# Altium PCB main.PcbDoc (part 1 of 8)
Units mil, origin at the board's own origin, x right, y up, seen from the top; angles counter-clockwise.
Board outline 3385.83 x 2362.2 mil, 8 copper layers (L1 (SIG), L2 (GND), L3 (SIG), L4 (GND), L5 (PWR), L6 (SIG), L7 (GND), L8 (SIG)), stack 46.958 mil thick; 318 components, 288 nets, 1482 pads, 1056 vias.
Unrouted connection lines stored in the file: 7.
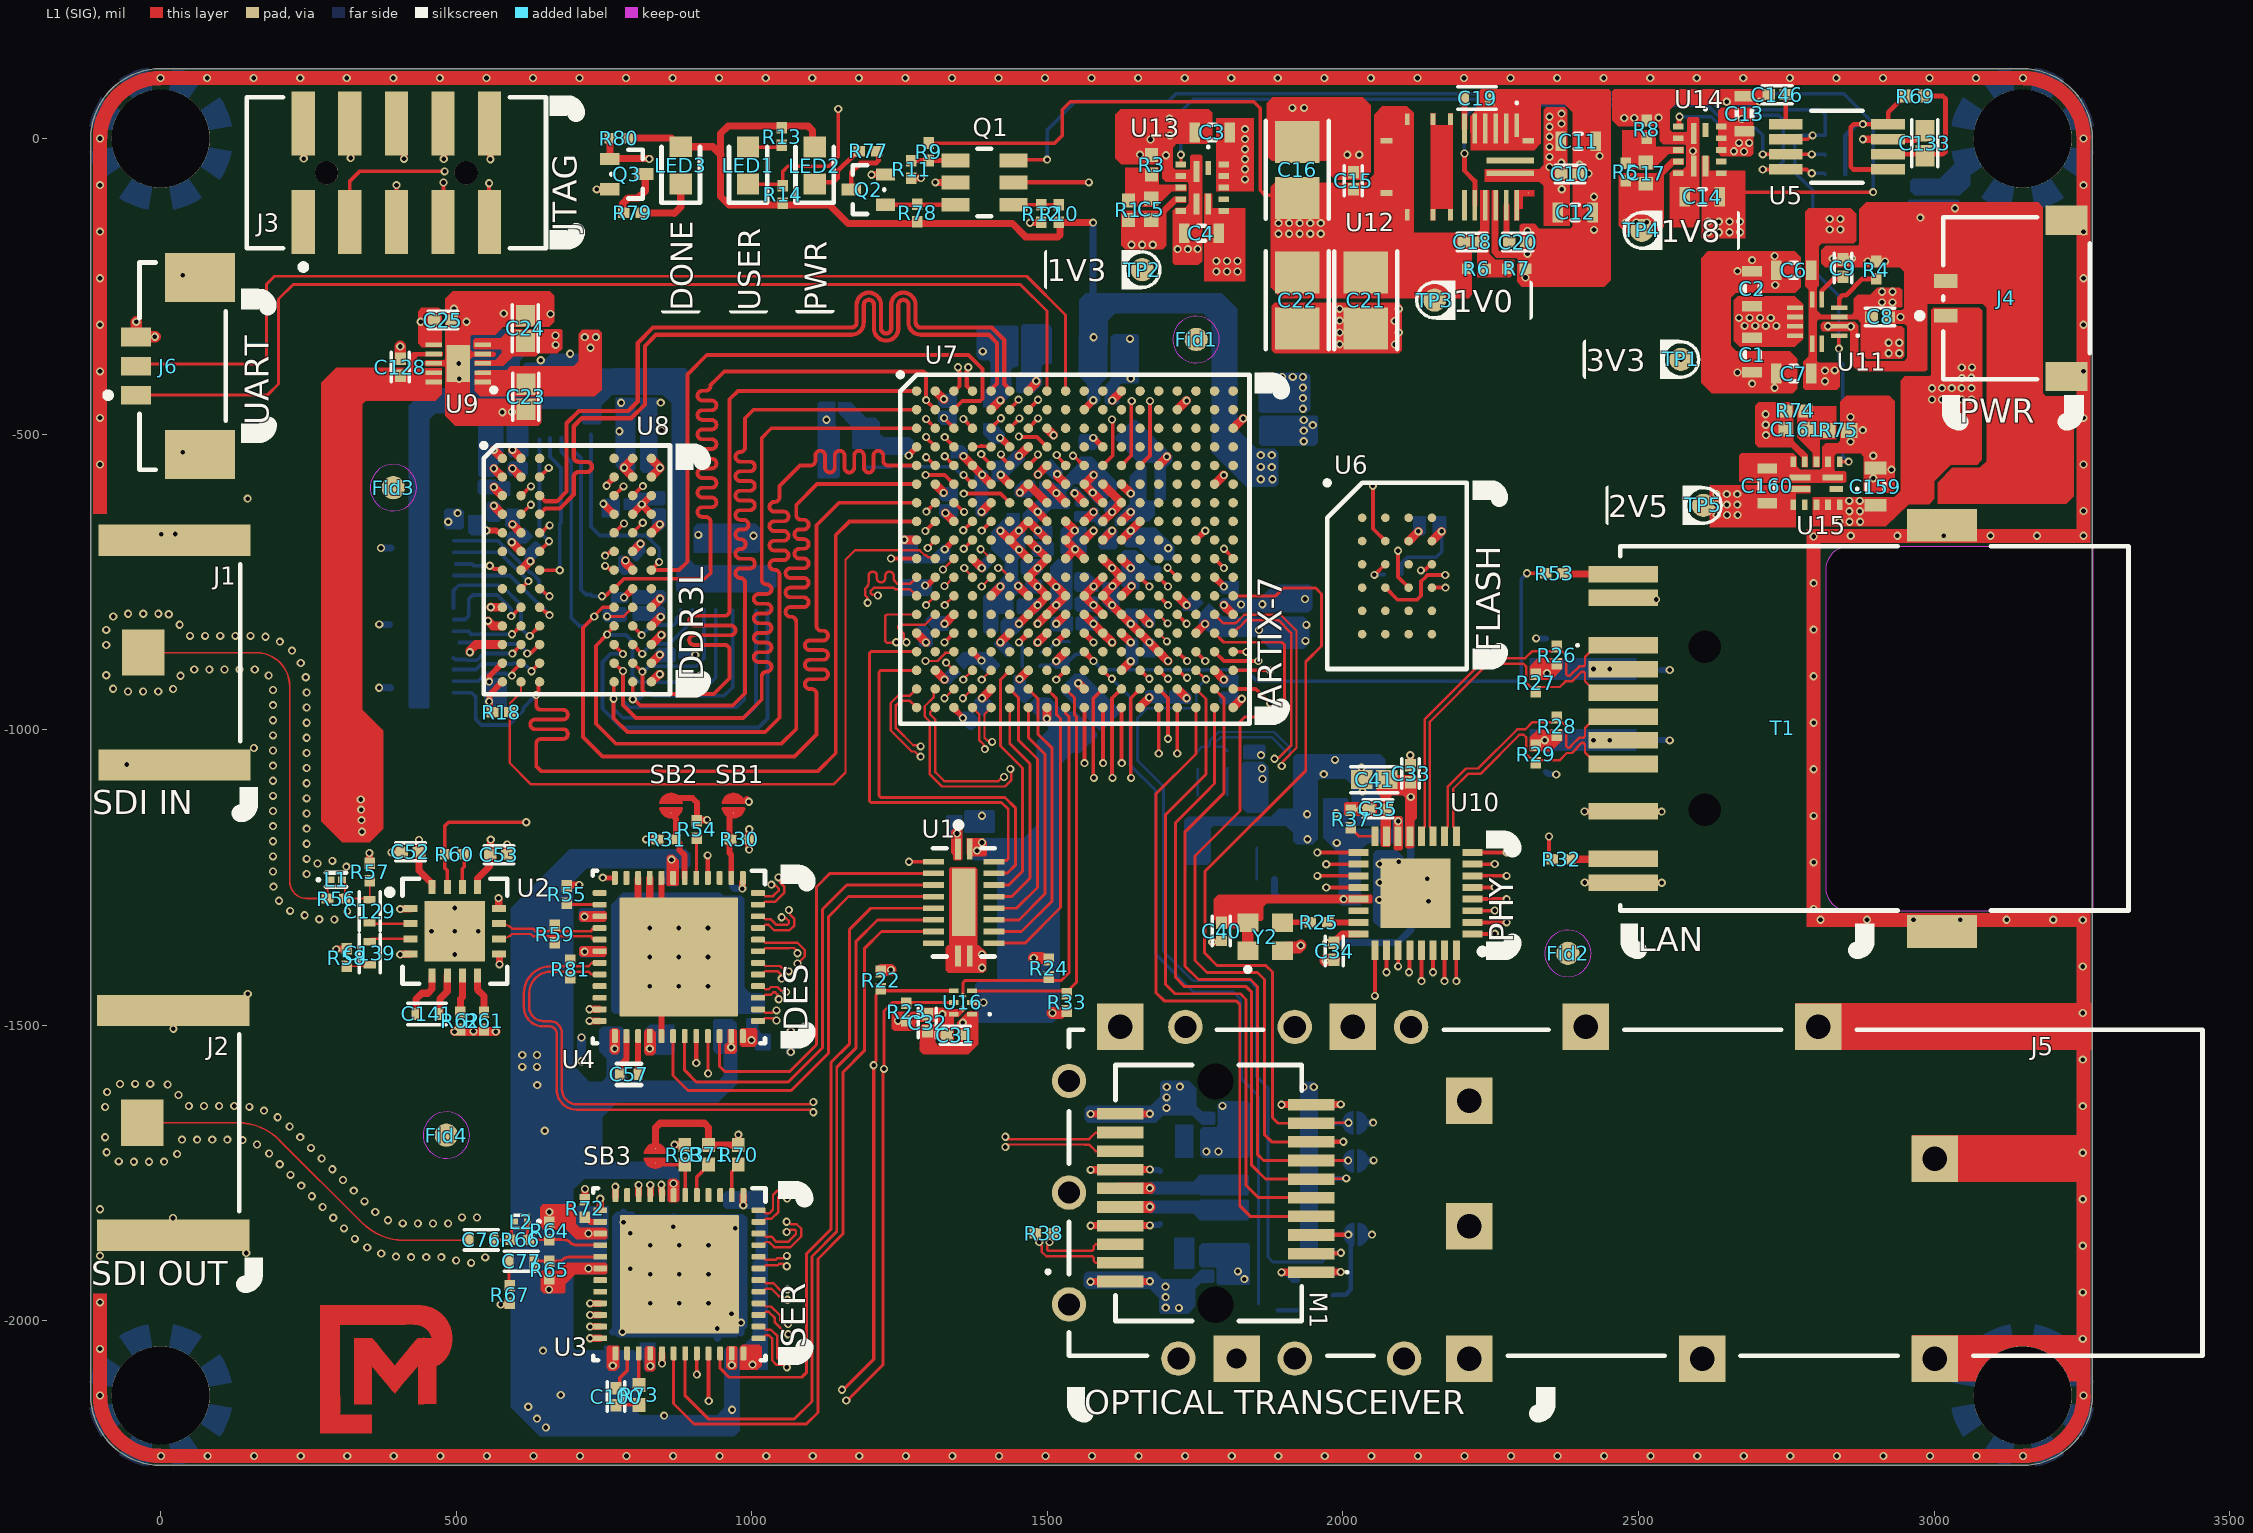
[diagram p0: L1 (SIG) view]
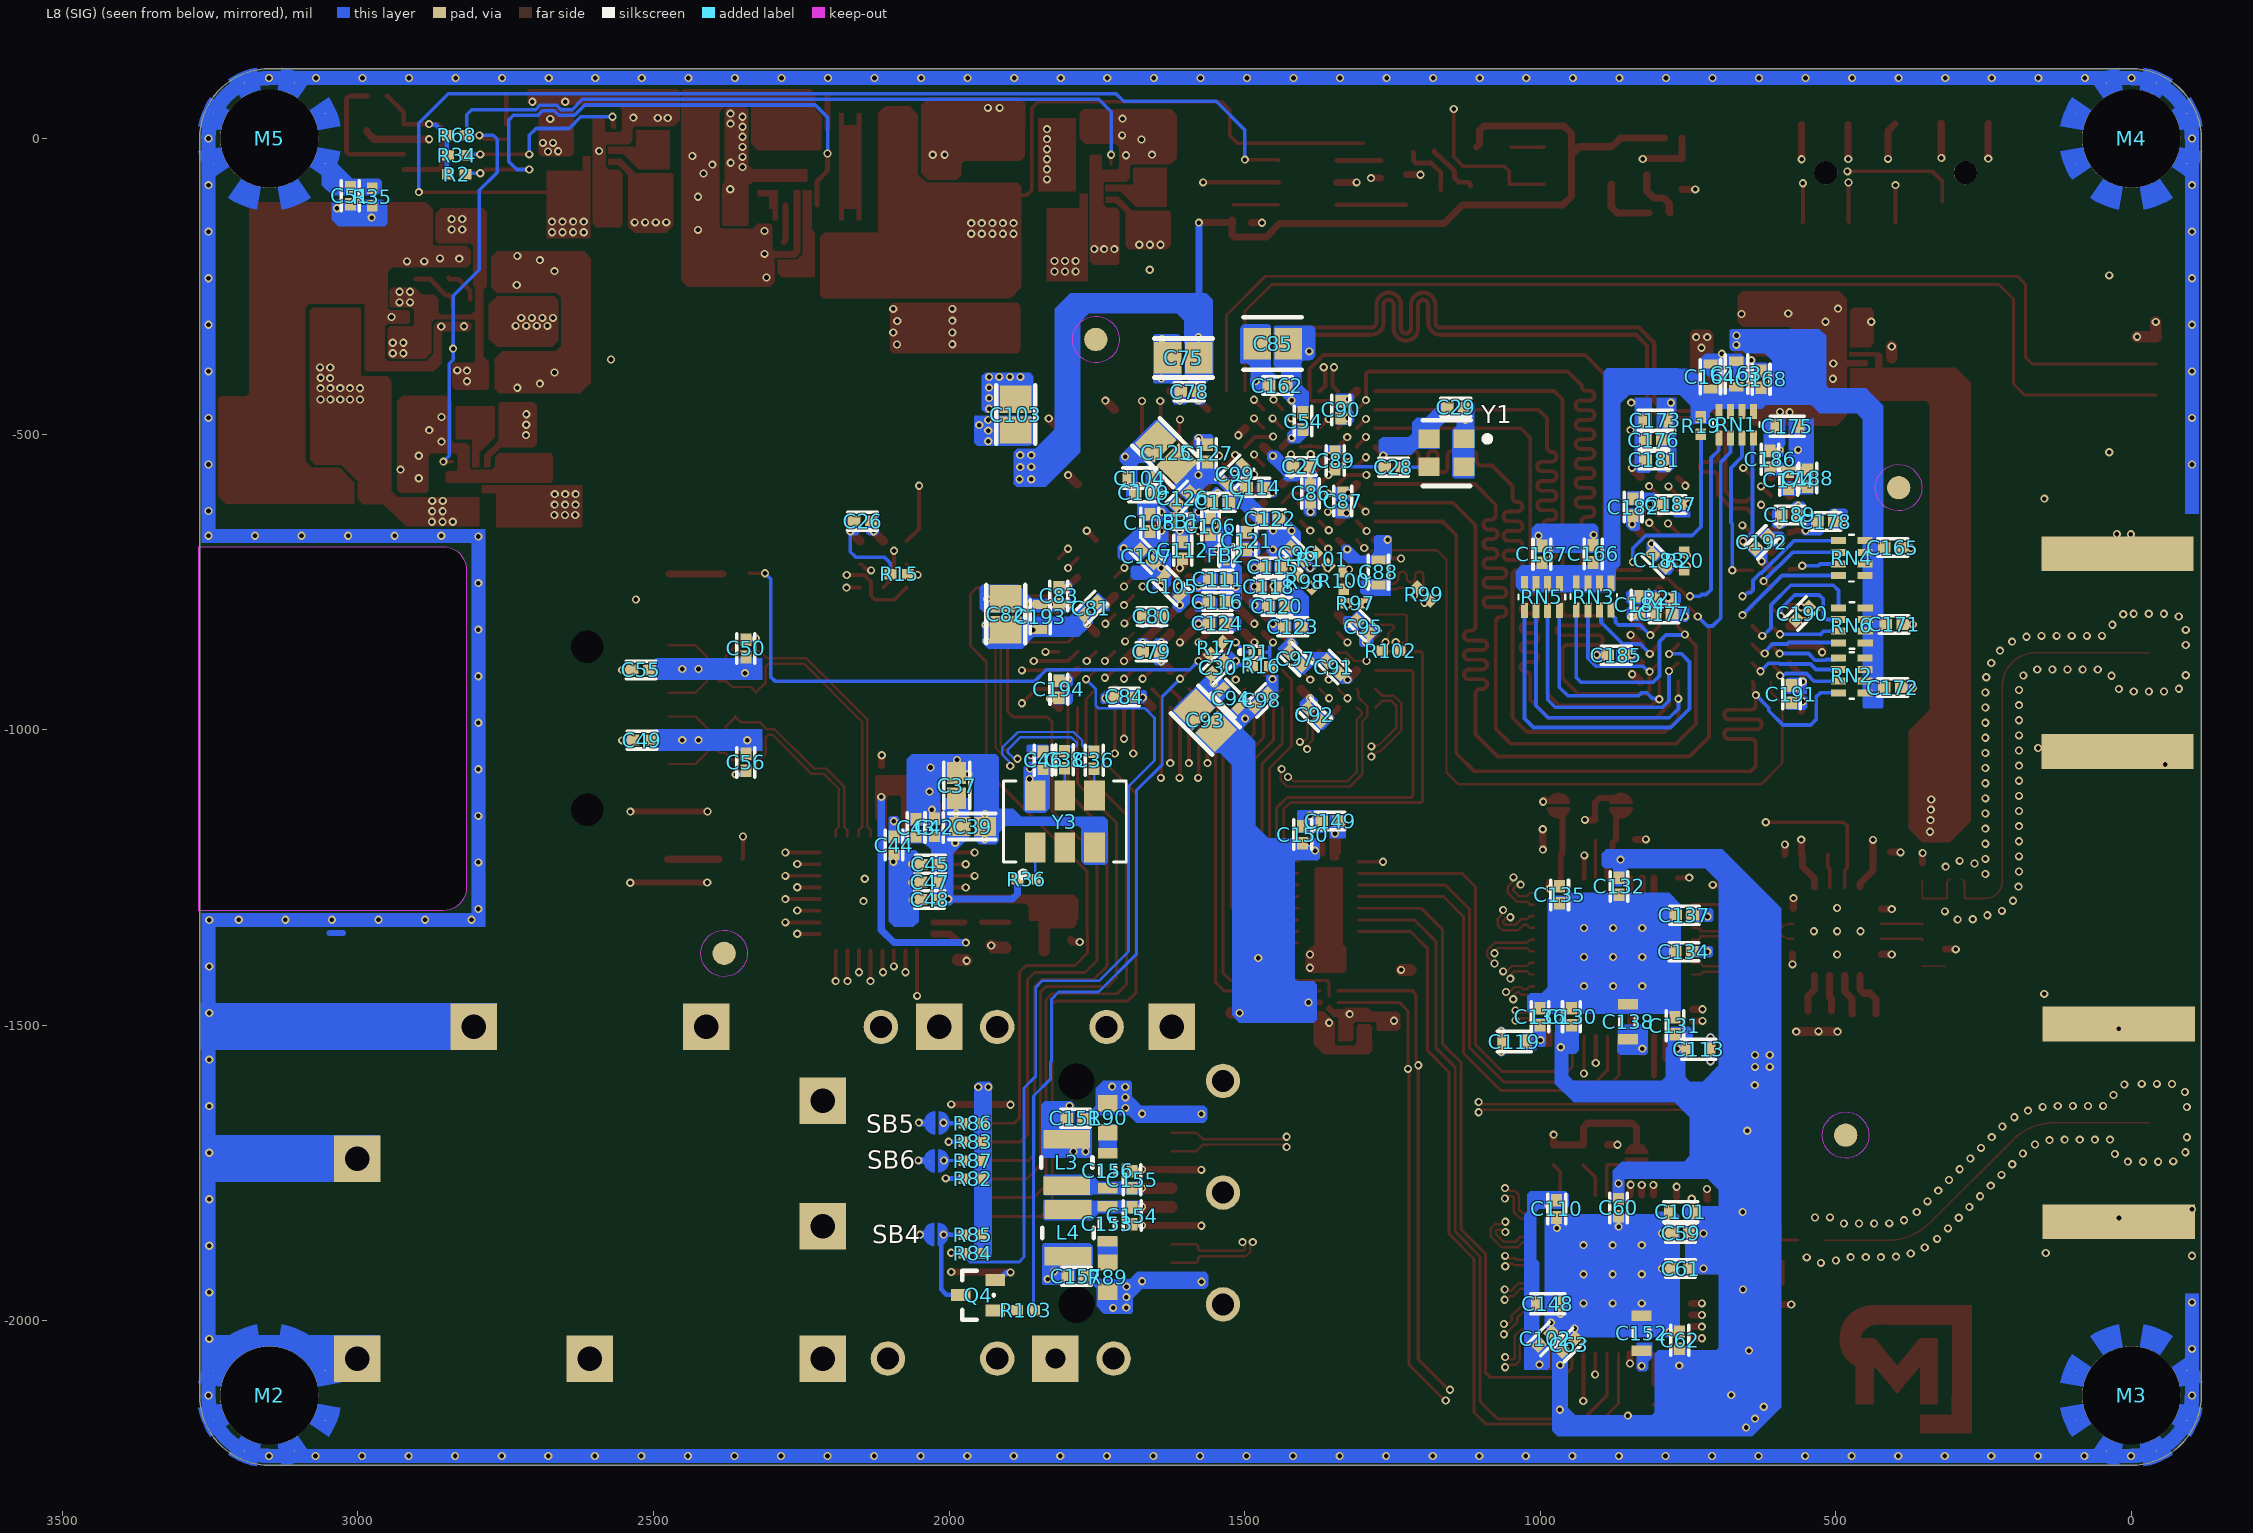
[diagram p1: L8 (SIG) view, seen from below]
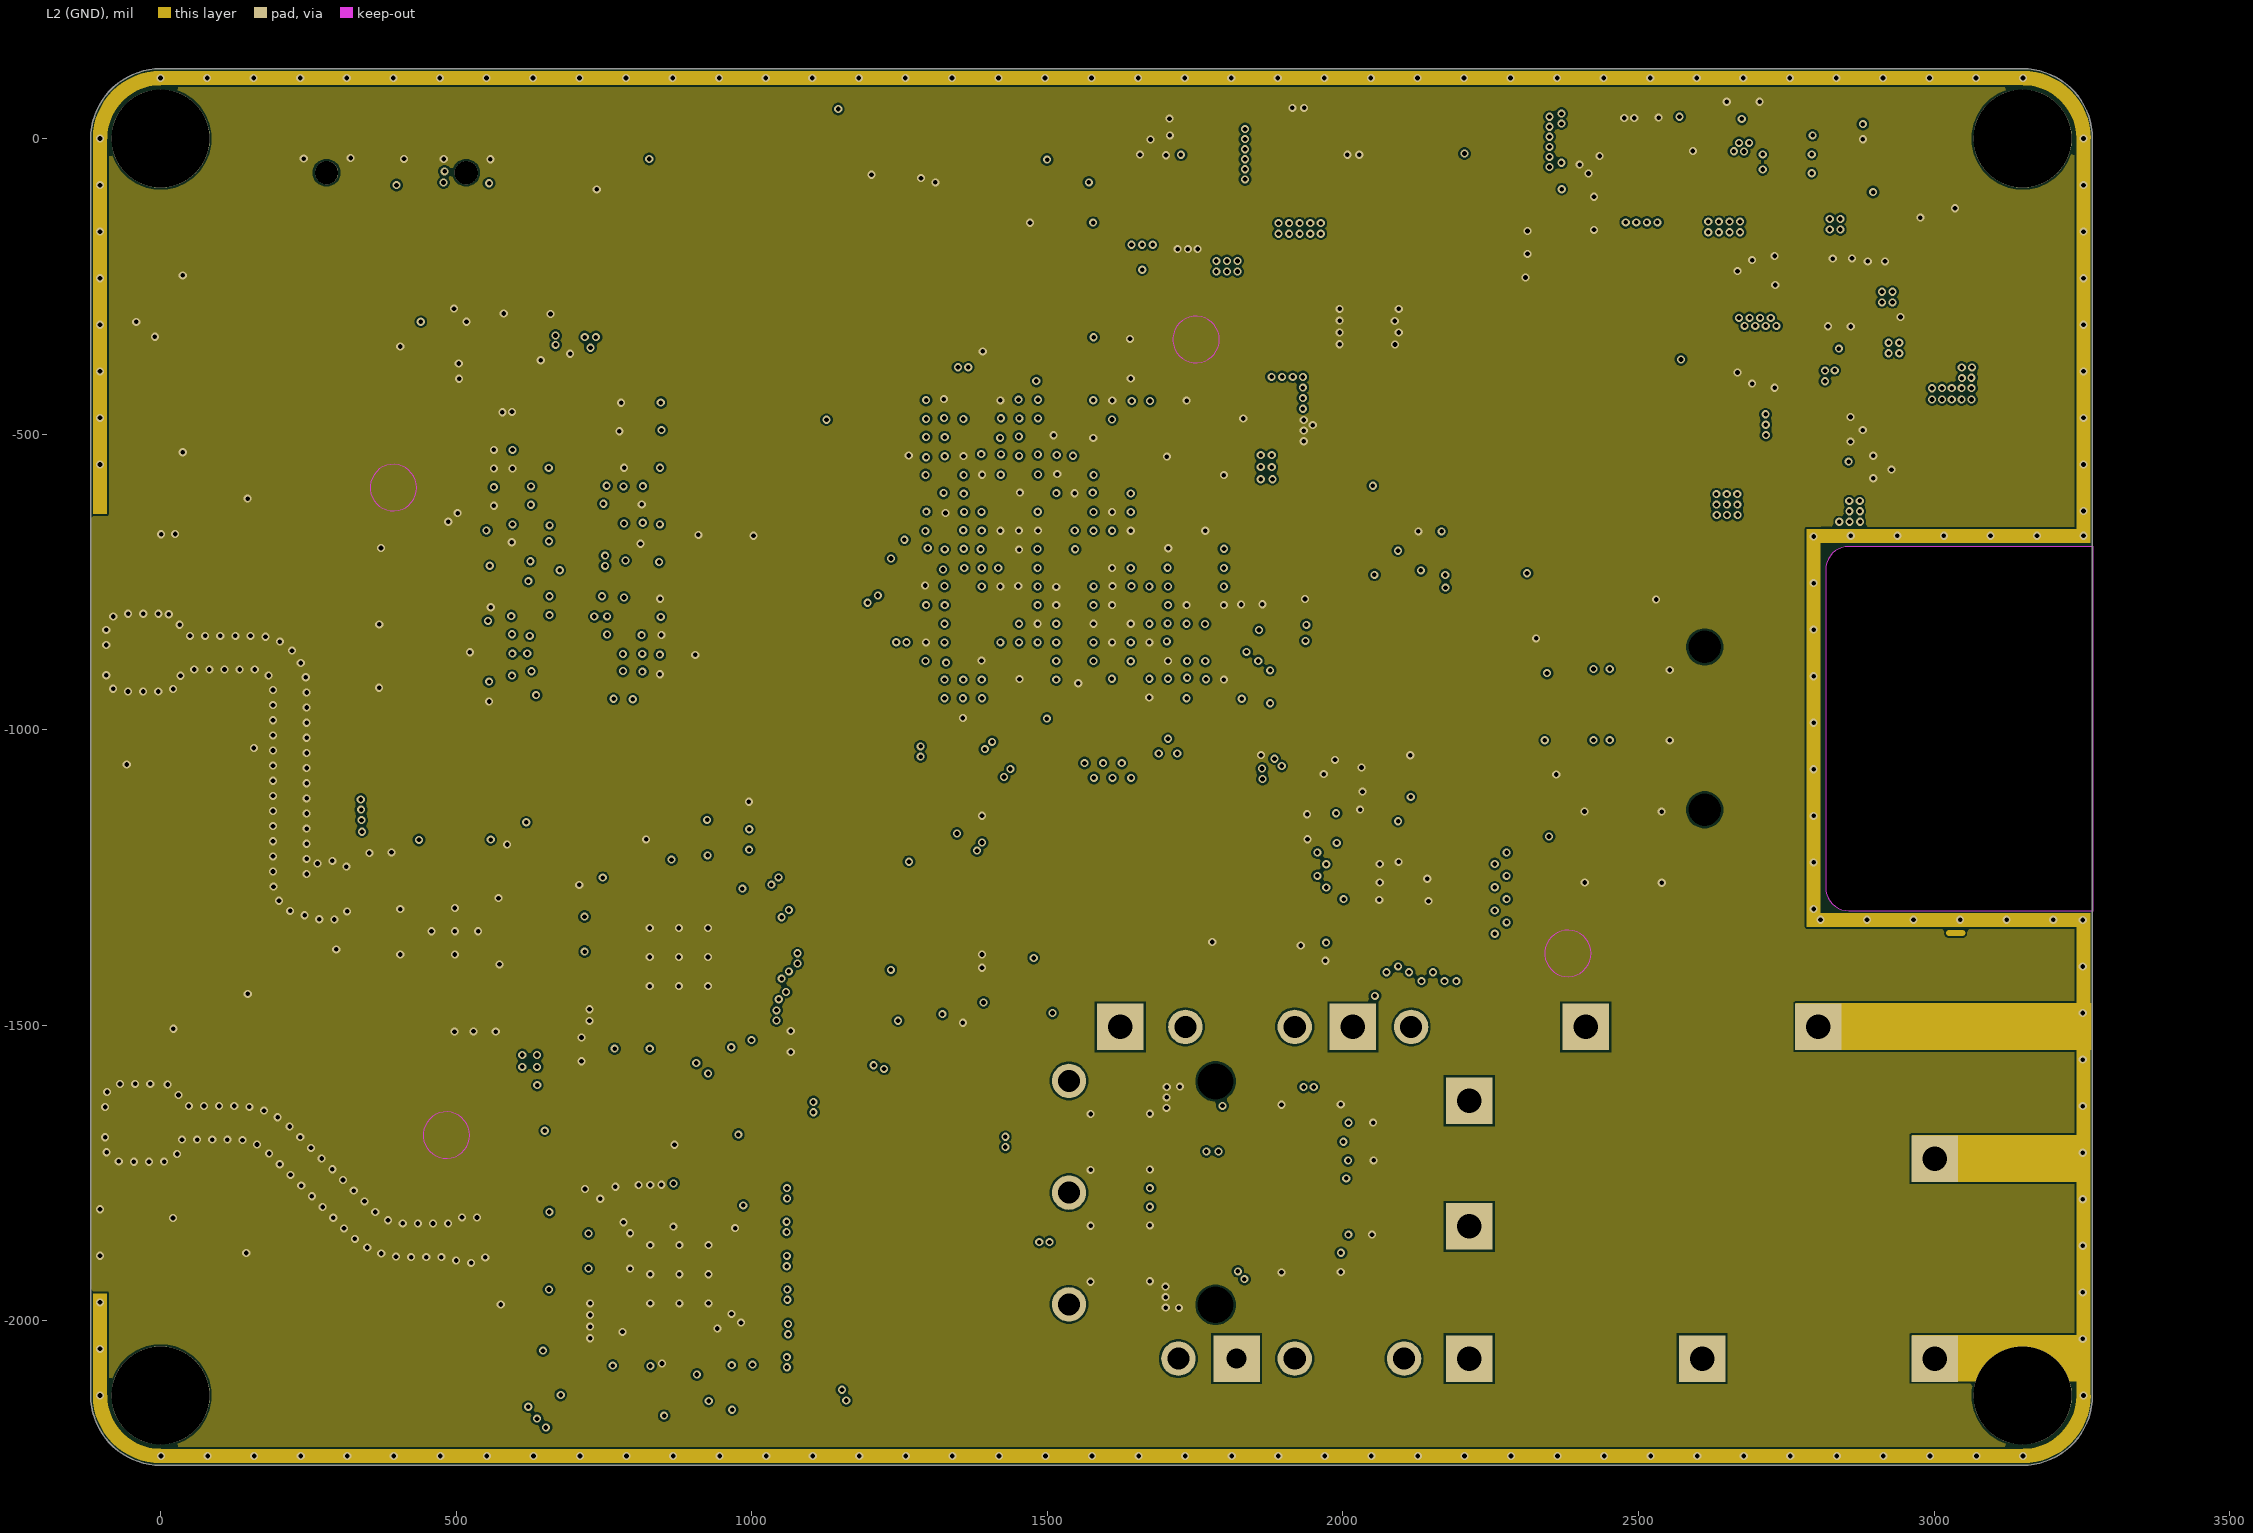
[diagram p2: L2 (GND)]
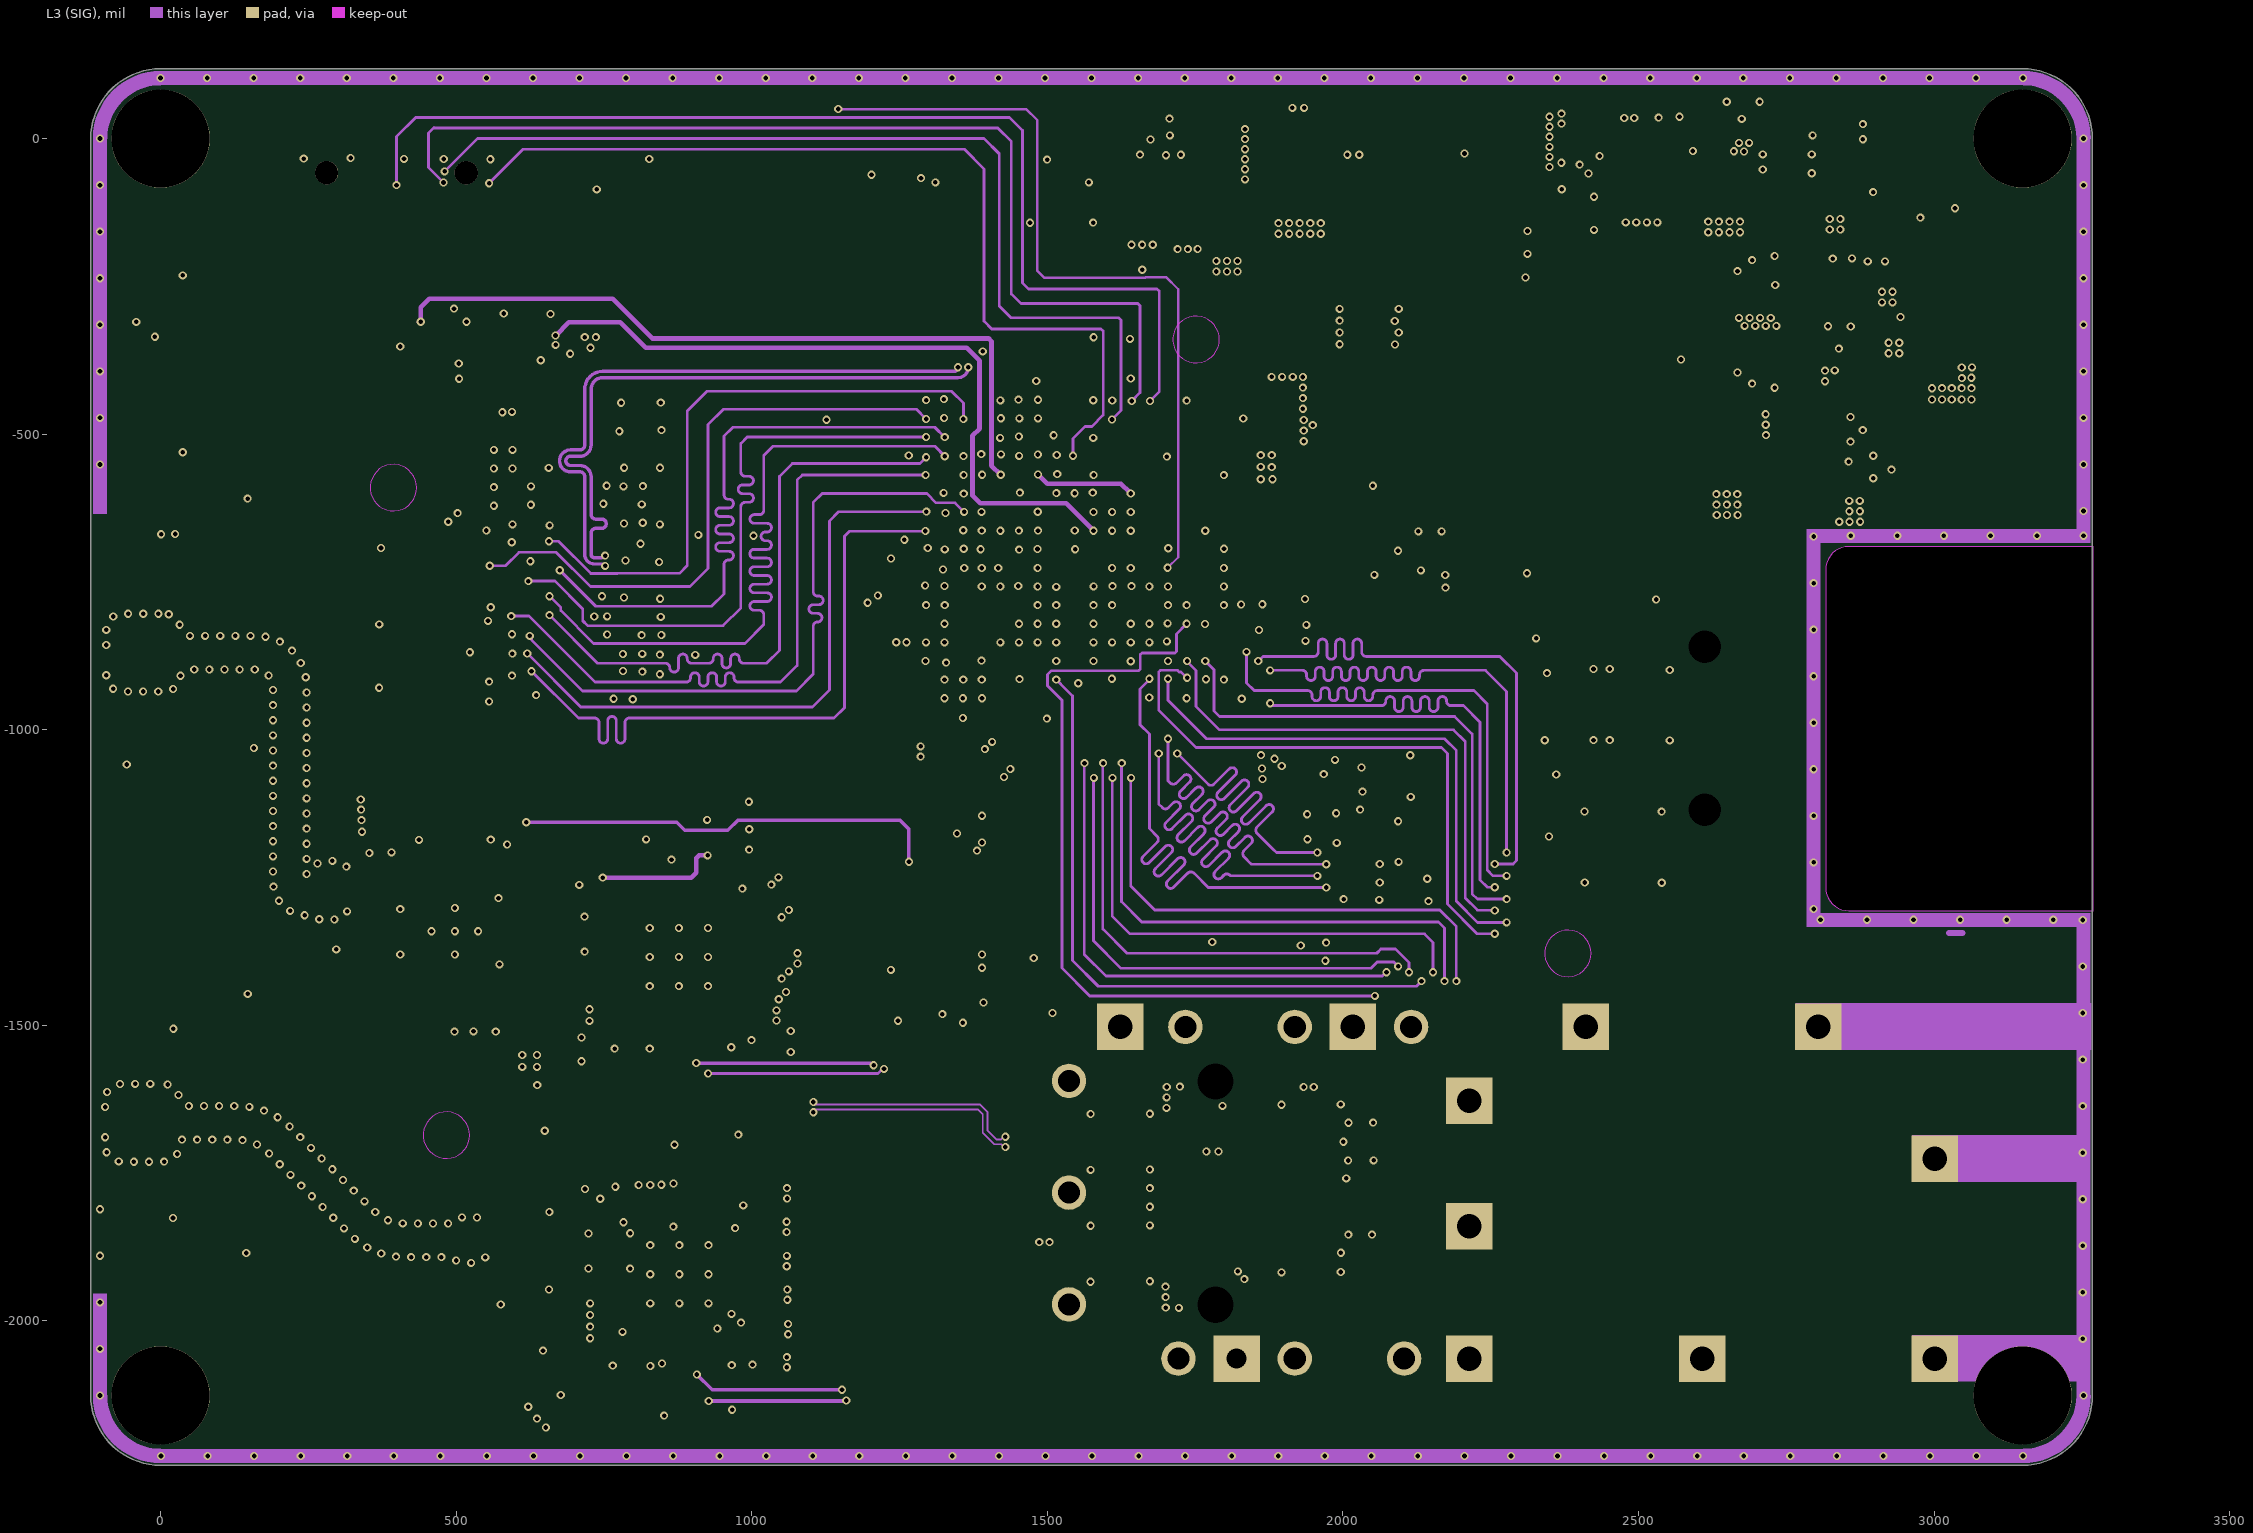
[diagram p3: L3 (SIG)]
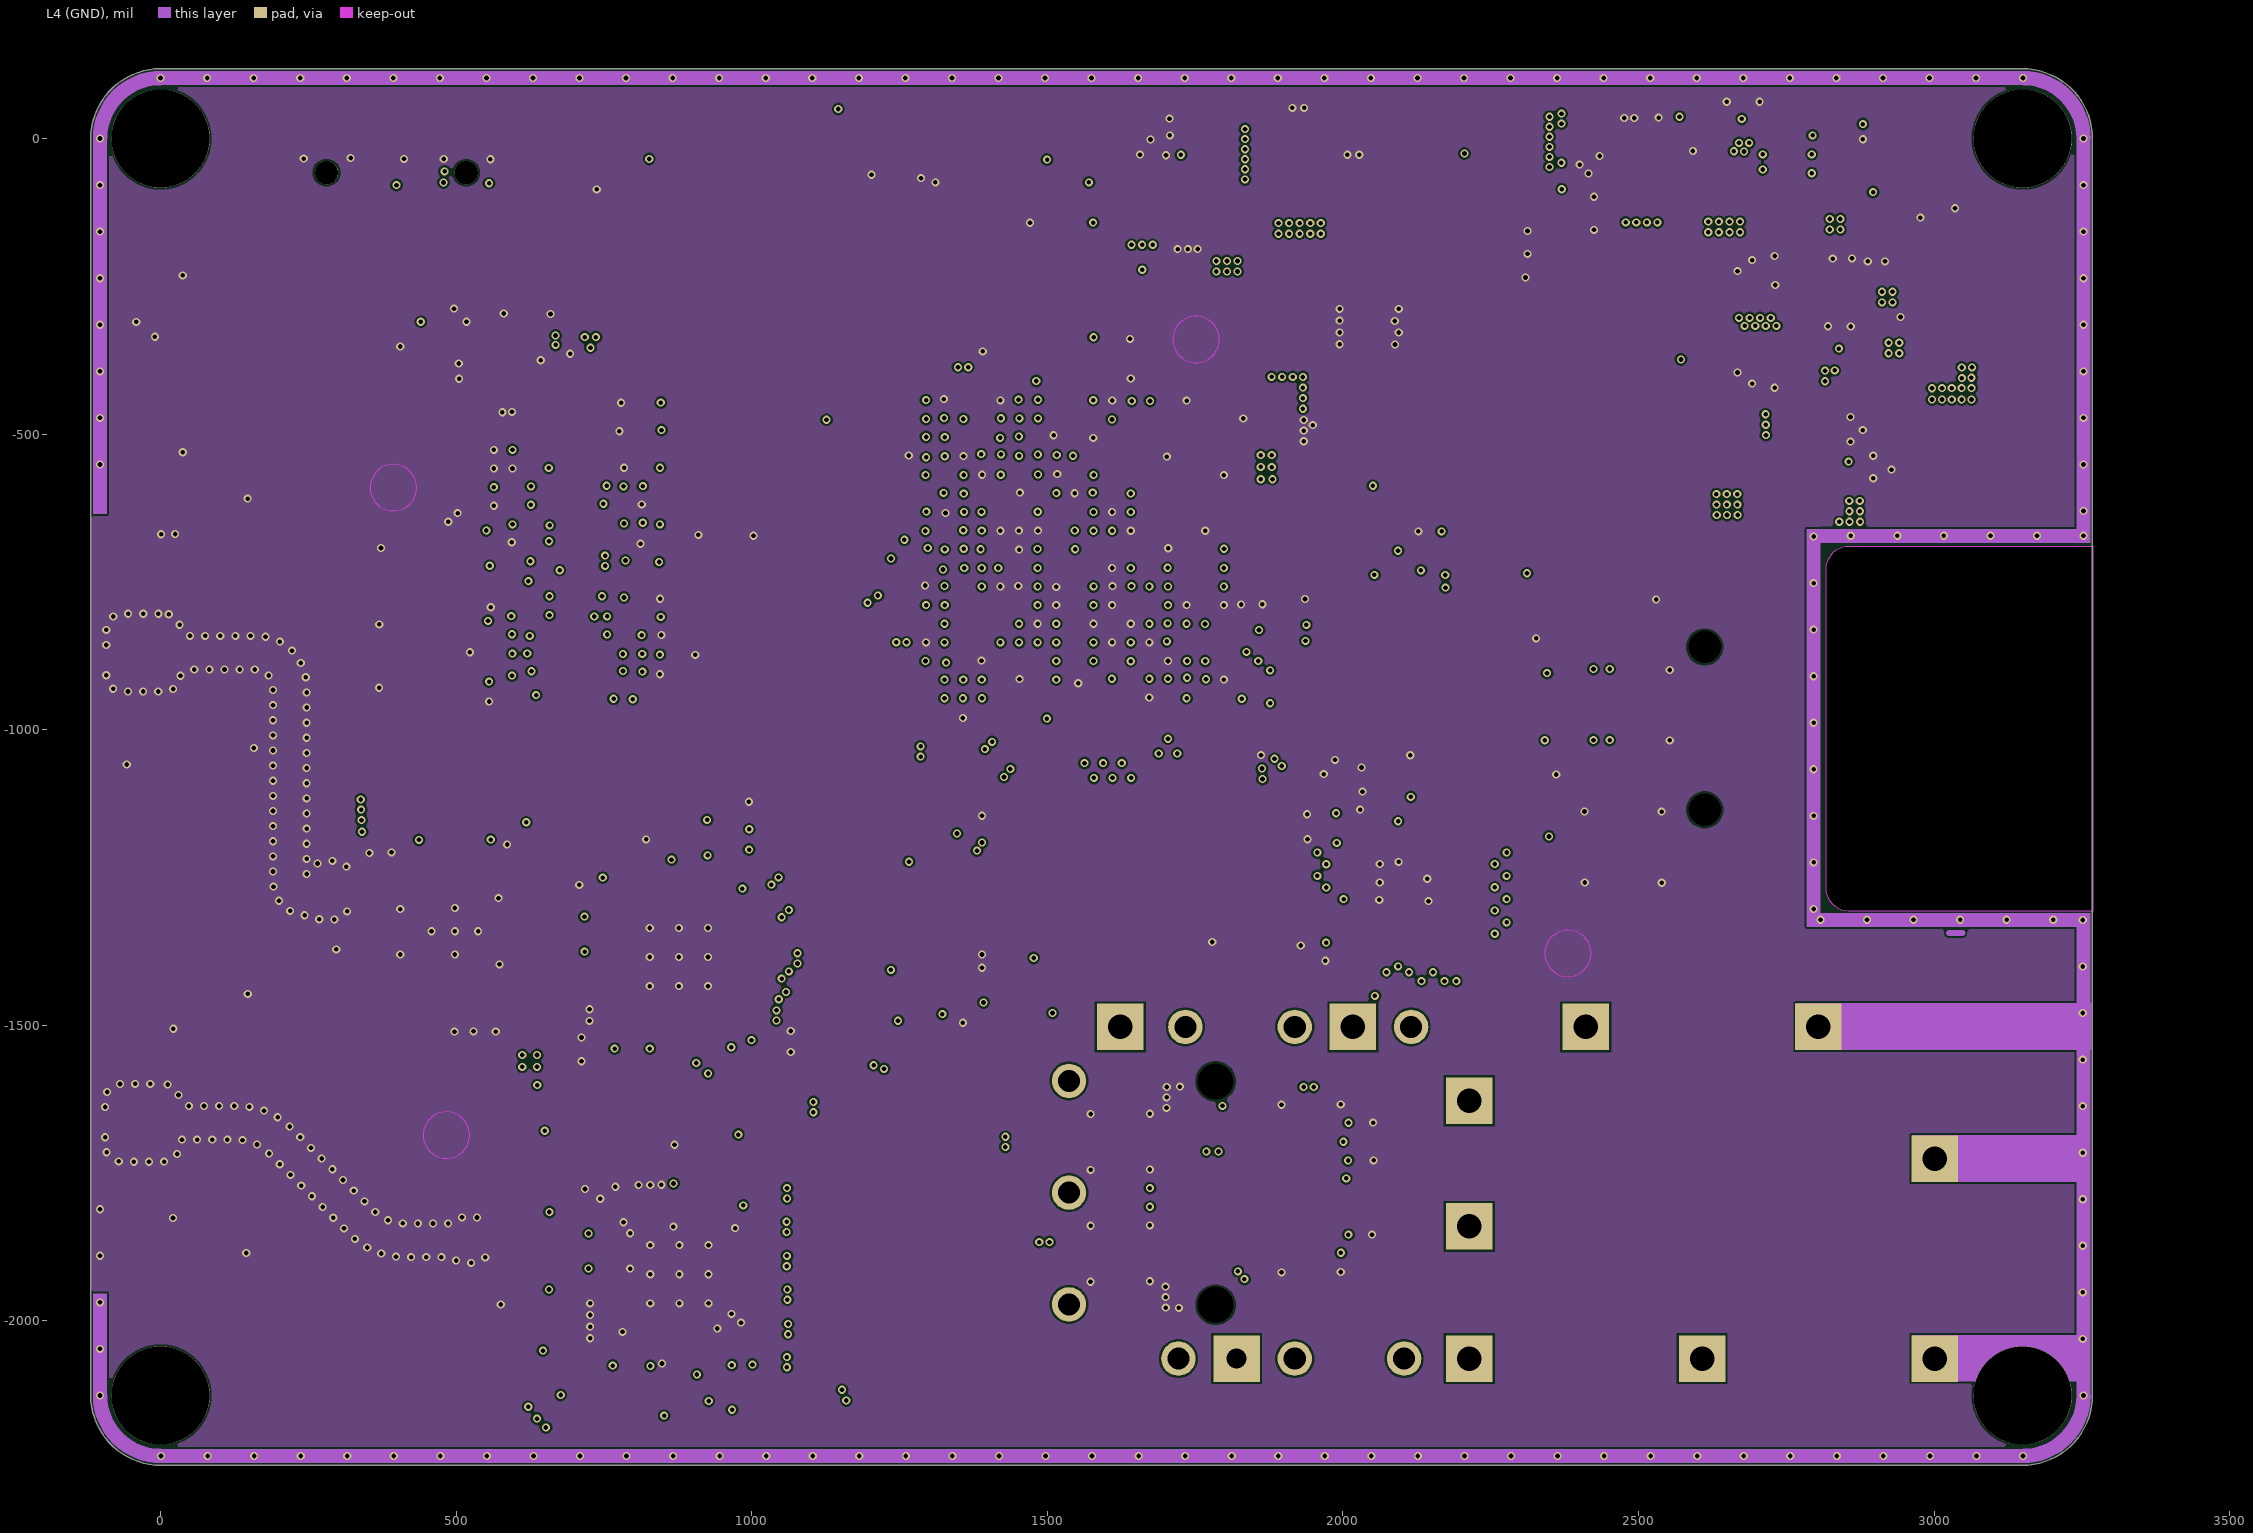
[diagram p4: L4 (GND)]
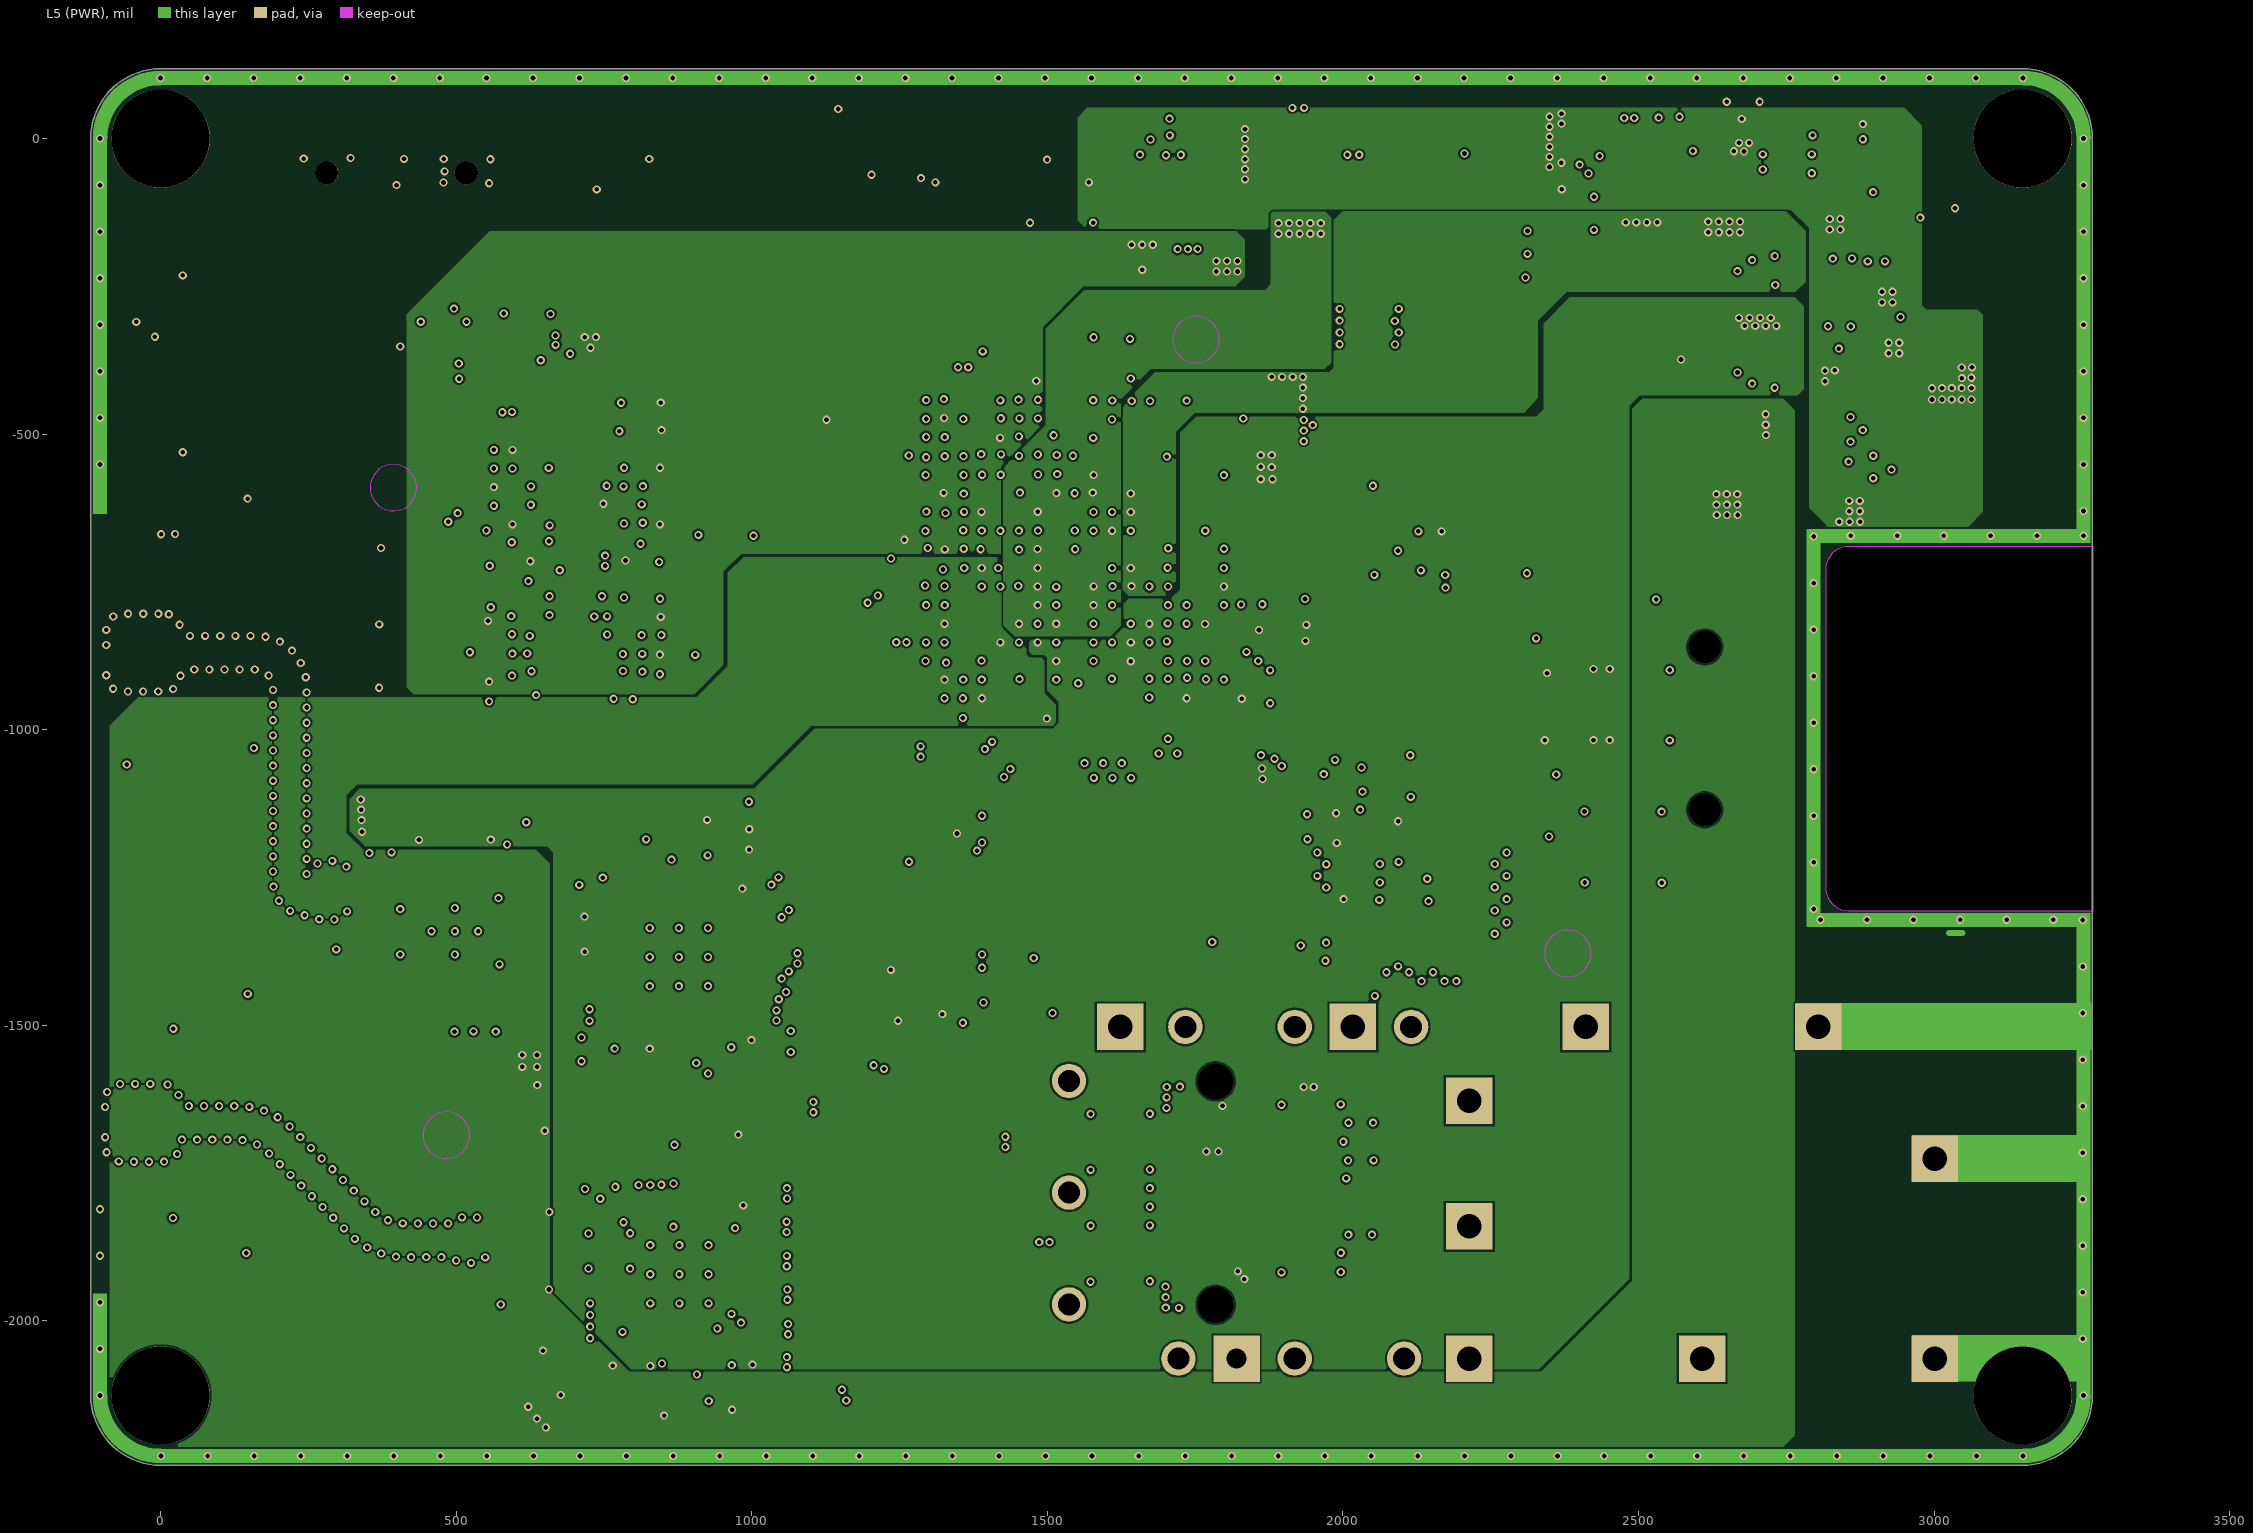
[diagram p5: L5 (PWR)]
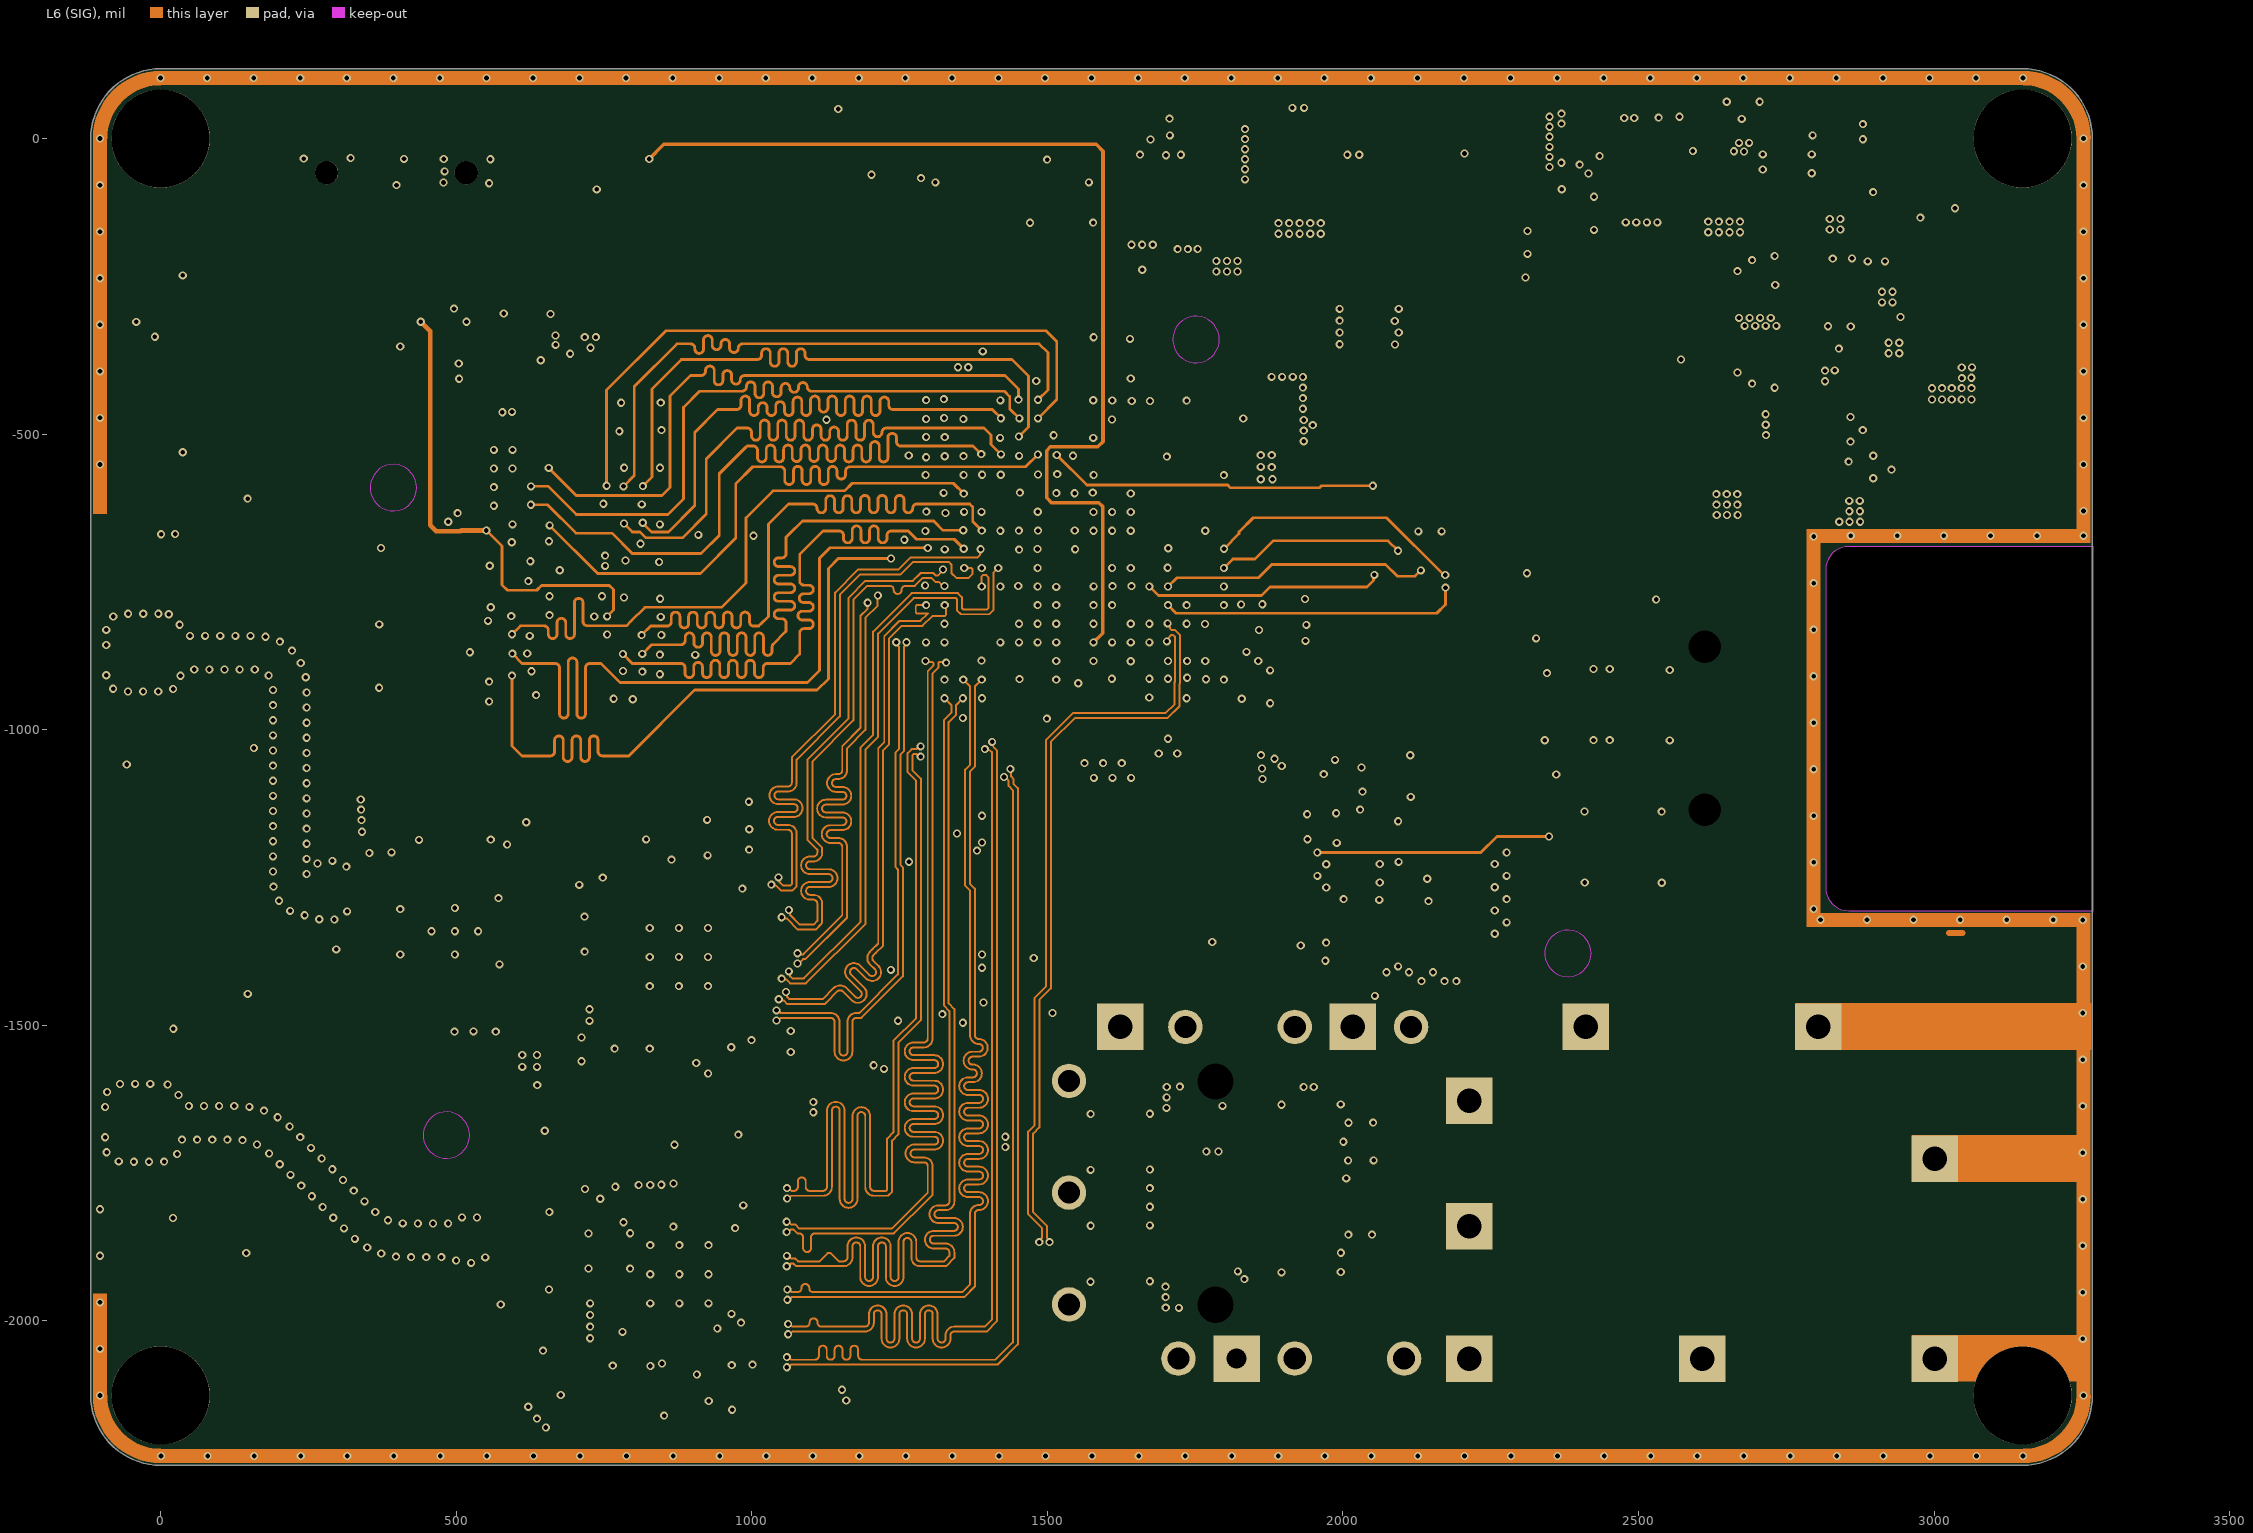
[diagram p6: L6 (SIG)]
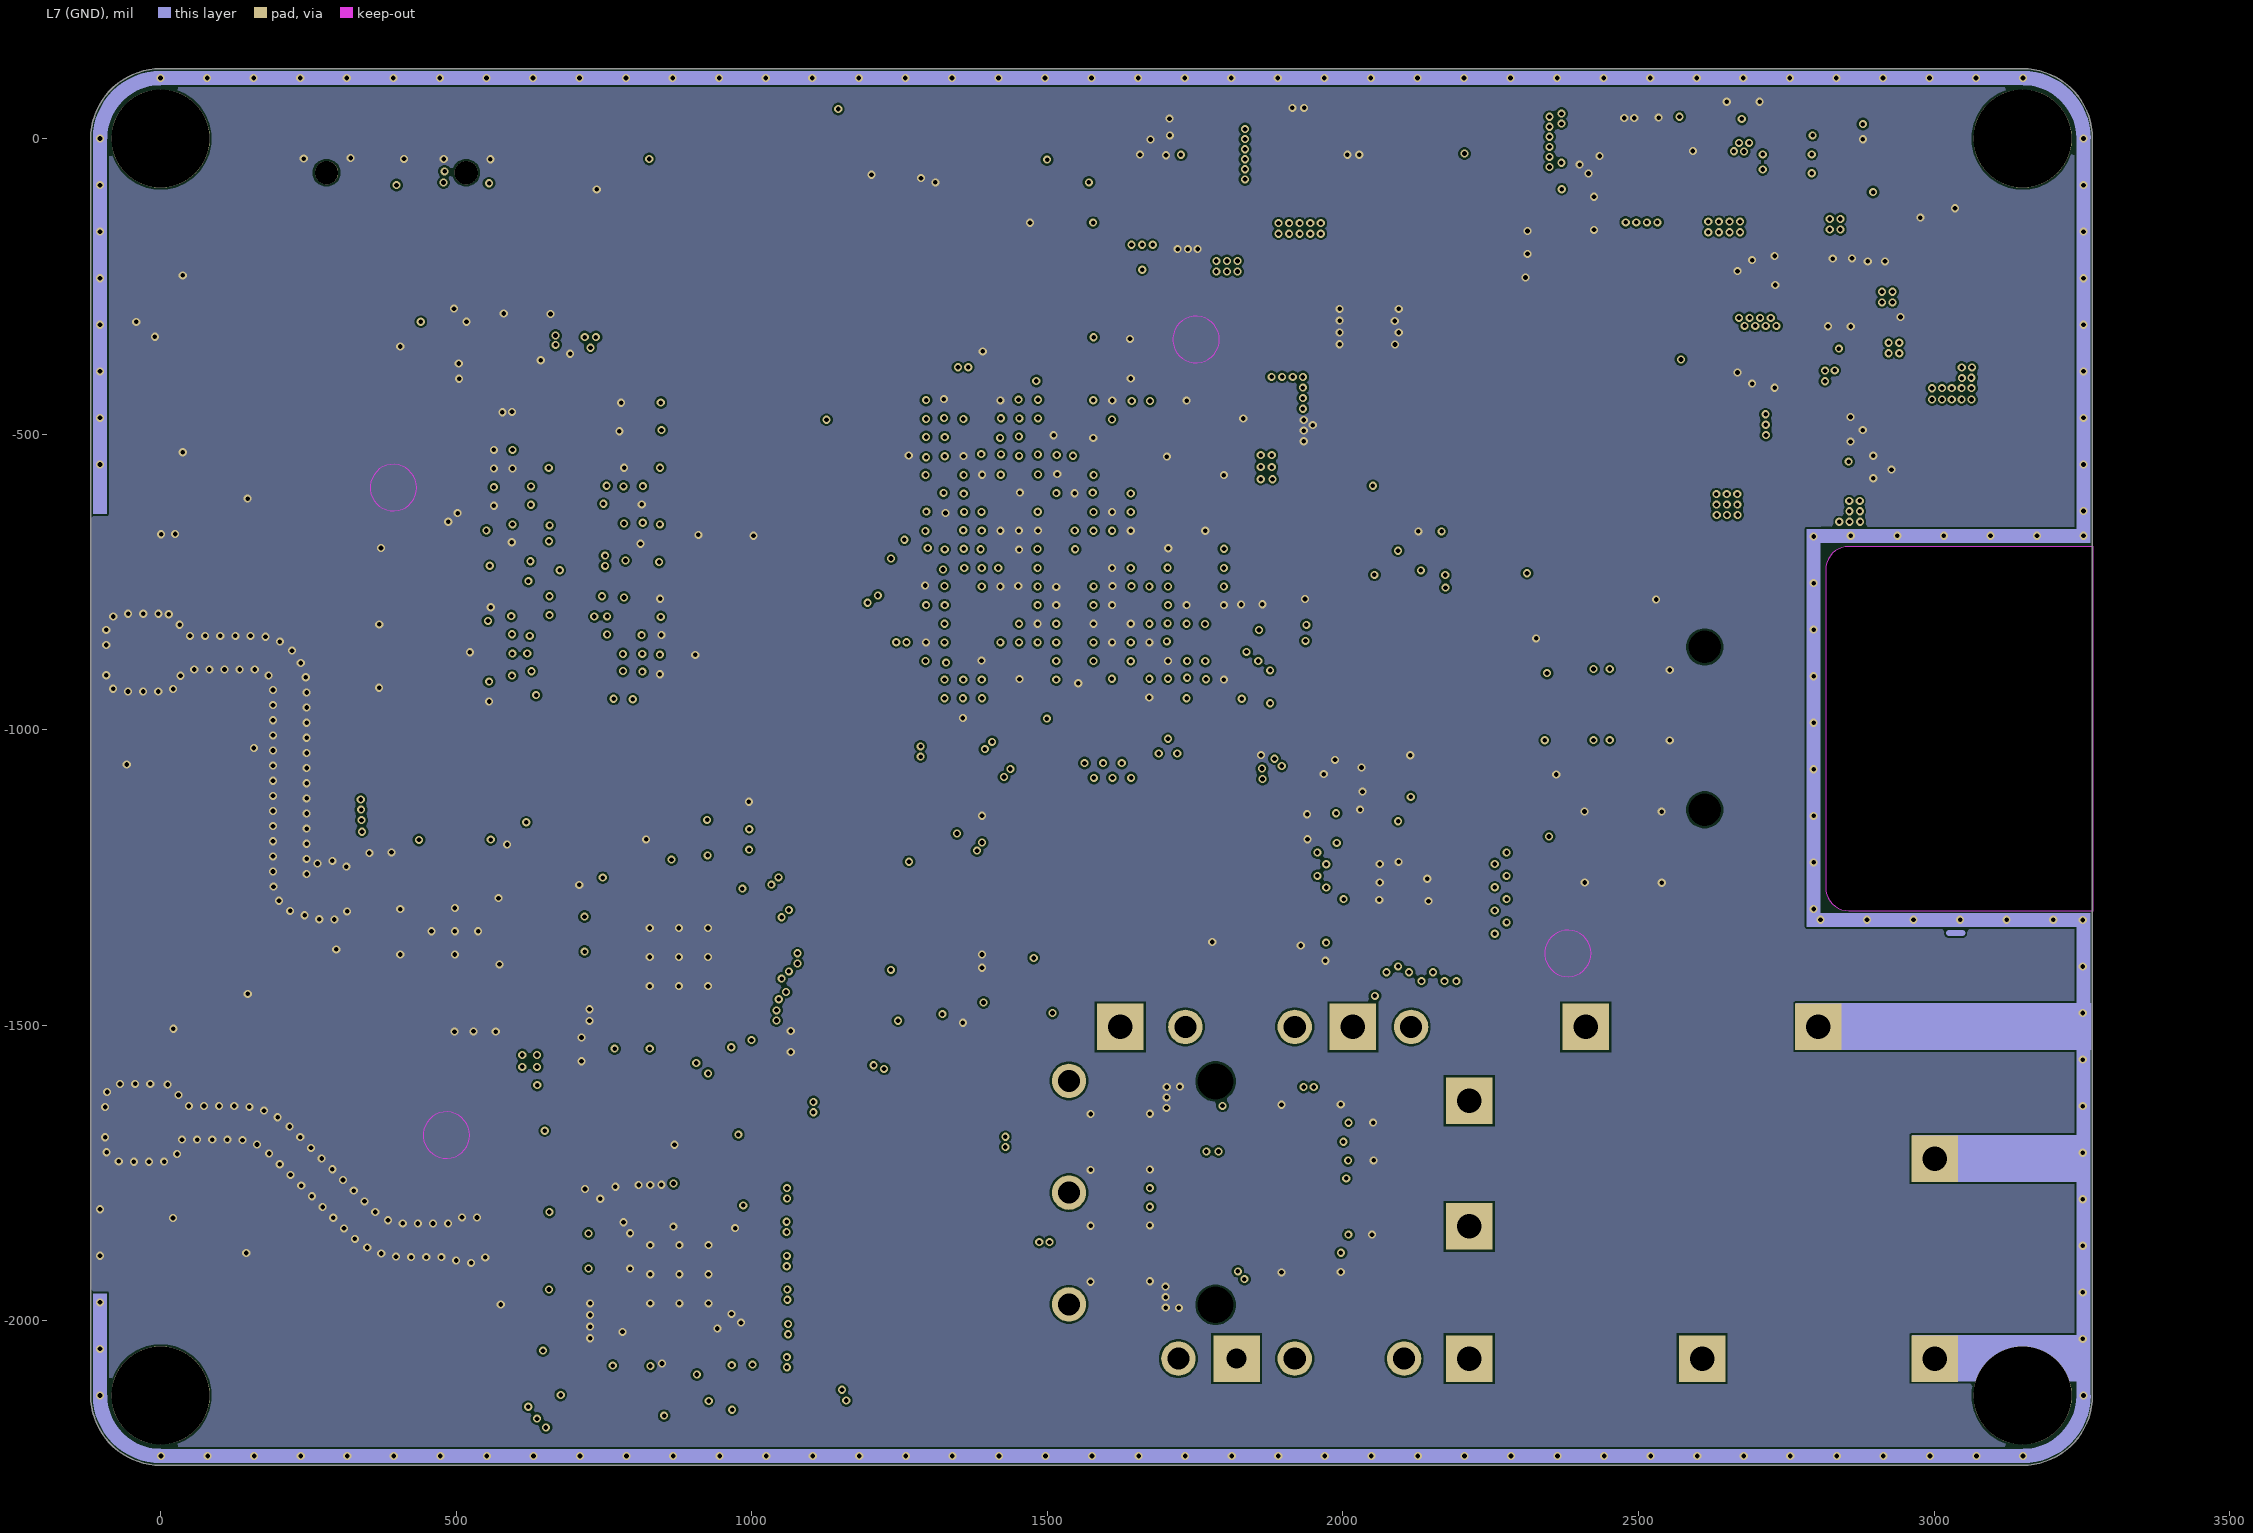
[diagram p7: L7 (GND)]
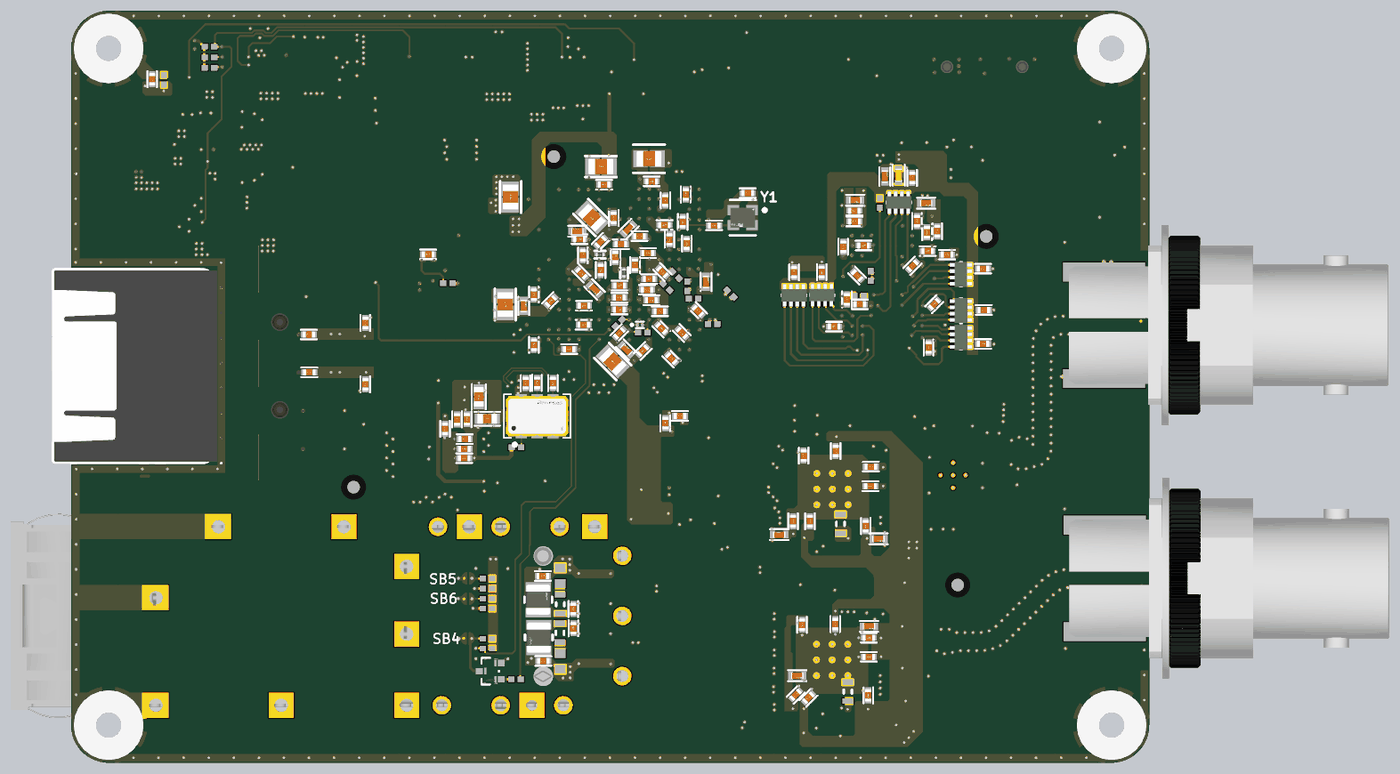
[diagram p13: 3D render of the assembled board from below, using the file's embedded part models]

## Layer stack, top to bottom
Top Solder: solder mask 0.6, Solder Resist, Dk 3.8
L1 (SIG): signal copper 1.378
Dielectric 1: prepreg 3.913, NP-155F, Dk 4.1
L2 (GND): signal copper 0.598
Dielectric 2: core 7.874, NP-155F, Dk 4.36
L3 (SIG): signal copper 0.598
Dielectric 3: prepreg 4.5831, NP-155F, Dk 4.16
L4 (GND): signal copper 0.598
Dielectric 4: core 7.874, NP-155F, Dk 4.36
L5 (PWR): signal copper 0.598
Dielectric 5: prepreg 4.5831, NP-155F, Dk 4.16
L6 (SIG): signal copper 0.598
Dielectric 6: core 7.874, NP-155F, Dk 4.36
L7 (GND): signal copper 0.598
Dielectric 7: prepreg 3.913, NP-155F, Dk 4.1
L8 (SIG): signal copper 1.378
Bottom Solder: solder mask 0.6, Solder Resist, Dk 3.8

## Board outline
-118.11,-2125.98 ccw(c0,-2125.98) 0,-2244.09 3149.61,-2244.09 ccw(c3149.61,-2125.98) 3267.72,-2125.98 3267.72,0 ccw(c3149.61,0) 3149.61,118.11 0,118.11 ccw(c0,0) -118.11,0
cut-out: 3269.29,-1306.17 3269.29,-690.03 2855.91,-690.03 ccw(c2855.91,-729.4) 2816.54,-729.4 2816.54,-1266.8 ccw(c2855.91,-1266.8) 2855.91,-1306.17

## Design rules (kind name [scope] priority, off if disabled: settings)
Clearance Clearance_DDR [(InNetClass('DDR-AC')  OR InNetClass('DDR-DQS'))] p1: gap=3.5 ignorepadtopadclearanceinfootprint=FALSE
Clearance [All] p2: gap=3.5 ignorepadtopadclearanceinfootprint=FALSE
ComponentClearance [All] p1: gap=0 collisioncheckmode=3 verticalgap=0 showdistances=TRUE
DiffPairsRouting DiffPairsRouting_SDI100 [InDifferentialPairClass('SDI100')] p1: maxlimit=5 minlimit=5 mostfreqgap=5 toplayer_minwidth=4.11 toplayer_maxwidth=4.11 toplayer_prefwidth=4.11 midlayer1_minwidth=3.3 midlayer1_maxwidth=3.3 midlayer1_prefwidth=3.3 midlayer2_minwidth=3.33 midlayer2_maxwidth=3.33 midlayer2_prefwidth=3.33 midlayer3_minwidth=3.3 midlayer3_maxwidth=3.3 midlayer3_prefwidth=3.3 midlayer4_minwidth=3.1 midlayer4_maxwidth=3.1 midlayer4_prefwidth=3.1 midlayer5_minwidth=3.1 midlayer5_maxwidth=3.1 midlayer5_prefwidth=3.1 midlayer7_minwidth=3.33 midlayer7_maxwidth=3.33 midlayer7_prefwidth=3.33 bottomlayer_minwidth=4.11 bottomlayer_maxwidth=4.11 bottomlayer_prefwidth=4.11 impedanceprofiledriven=TRUE impedanceprofileid={C2A439CB-E0D4-4CDB-BD2E-7FC3D9AE3FAE} impedanceprofilevalue=100.000000 maxuncoupledlength=500
DiffPairsRouting DiffPairsRouting_DDR [InDifferentialPair('DDR3_DQS0')  or InDifferentialPair('DDR3_CLK0')] p2: maxlimit=5 minlimit=5 mostfreqgap=5 toplayer_minwidth=7.11 toplayer_maxwidth=7.11 toplayer_prefwidth=7.11 midlayer1_minwidth=5.77 midlayer1_maxwidth=5.77 midlayer1_prefwidth=5.77 midlayer2_minwidth=5.81 midlayer2_maxwidth=5.81 midlayer2_prefwidth=5.81 midlayer3_minwidth=5.77 midlayer3_maxwidth=5.77 midlayer3_prefwidth=5.77 midlayer4_minwidth=5.34 midlayer4_maxwidth=5.34 midlayer4_prefwidth=5.34 midlayer5_minwidth=5.34 midlayer5_maxwidth=5.34 midlayer5_prefwidth=5.34 midlayer7_minwidth=5.81 midlayer7_maxwidth=5.81 midlayer7_prefwidth=5.81 bottomlayer_minwidth=7.11 bottomlayer_maxwidth=7.11 bottomlayer_prefwidth=7.11 impedanceprofiledriven=TRUE impedanceprofileid={C9C27306-6E31-4A9A-A182-F1B8B8414803} impedanceprofilevalue=80.000000 maxuncoupledlength=500
DiffPairsRouting [All] p3: maxlimit=5 minlimit=5 mostfreqgap=5 toplayer_minwidth=4.11 toplayer_maxwidth=4.11 toplayer_prefwidth=4.11 midlayer1_minwidth=3.3 midlayer1_maxwidth=3.3 midlayer1_prefwidth=3.3 midlayer2_minwidth=3.33 midlayer2_maxwidth=3.33 midlayer2_prefwidth=3.33 midlayer3_minwidth=3.3 midlayer3_maxwidth=3.3 midlayer3_prefwidth=3.3 midlayer4_minwidth=3.1 midlayer4_maxwidth=3.1 midlayer4_prefwidth=3.1 midlayer5_minwidth=3.1 midlayer5_maxwidth=3.1 midlayer5_prefwidth=3.1 midlayer7_minwidth=3.33 midlayer7_maxwidth=3.33 midlayer7_prefwidth=3.33 bottomlayer_minwidth=4.11 bottomlayer_maxwidth=4.11 bottomlayer_prefwidth=4.11 impedanceprofiledriven=TRUE impedanceprofileid={C2A439CB-E0D4-4CDB-BD2E-7FC3D9AE3FAE} impedanceprofilevalue=100.000000 maxuncoupledlength=500
HoleToHoleClearance [All] p1: gap=7.87 allowstackedmicrovias=TRUE
MatchedLengths "Schematic Matched Net Lengths" [InNetClass('FLASH')] p1: tolerance=1000 checknetsindiffpair=FALSE checkdiffpairvsdiffpair=TRUE checkxsignals=TRUE checkothers=TRUE usedelayunits=TRUE delaytolerance=100.000000
MatchedLengths MatchLengths_xSignals_SPIFLASH [InxSignalClass('xSignals_SPIFLASH_MatchLengthsClass')] p2: tolerance=10 checknetsindiffpair=FALSE checkdiffpairvsdiffpair=TRUE checkxsignals=TRUE checkothers=TRUE usedelayunits=TRUE delaytolerance=10.000000
MatchedLengths MatchLengths_xSignals_U7_U3 [InxSignalClass('xSignals_U7_U3_MatchLengthsClass')] p3: tolerance=5 checknetsindiffpair=FALSE checkdiffpairvsdiffpair=TRUE checkxsignals=TRUE checkothers=TRUE usedelayunits=TRUE delaytolerance=10.000000
MatchedLengths MatchLengths_xSignals_U4_U7 [InxSignalClass('xSignals_U4_U7_MatchLengthsClass')] p4: tolerance=5 checknetsindiffpair=FALSE checkdiffpairvsdiffpair=TRUE checkxsignals=TRUE checkothers=TRUE usedelayunits=TRUE delaytolerance=10.000000
MatchedLengths MatchedLengths_DDR_CLOCKS_STROBES [InxSignalClass('ADDR_PP1') OR InxSignalClass('DATA_BL0')] p5: tolerance=0 checknetsindiffpair=TRUE checkdiffpairvsdiffpair=FALSE checkxsignals=FALSE checkothers=FALSE usedelayunits=TRUE delaytolerance=1.000000
MatchedLengths MatchedLengths_DATA_BL0 [InxSignalClass('DATA_BL0')] p6: tolerance=0 checknetsindiffpair=FALSE checkdiffpairvsdiffpair=TRUE checkxsignals=TRUE checkothers=TRUE usedelayunits=TRUE delaytolerance=5.000000
MatchedLengths MatchedLengths_ADDR_PP1 [InxSignalClass('ADDR_PP1')] p7: tolerance=0 checknetsindiffpair=FALSE checkdiffpairvsdiffpair=TRUE checkxsignals=TRUE checkothers=TRUE usedelayunits=TRUE delaytolerance=25.000000
MatchedLengths MatchedLengths_DDR_CK [InDifferentialPair('DDR3_DQS0')] p8: tolerance=1000 checknetsindiffpair=FALSE checkdiffpairvsdiffpair=TRUE checkxsignals=TRUE checkothers=TRUE usedelayunits=TRUE delaytolerance=1.000000
MatchedLengths "Schematic Matched Net Lengths_ETH" [InNetClass('ETHERNET')] p9: tolerance=1000 checknetsindiffpair=FALSE checkdiffpairvsdiffpair=TRUE checkxsignals=TRUE checkothers=TRUE usedelayunits=TRUE delaytolerance=100.000000
MaxMinImpedance "Schematic Impedance Constraint_2" [InNet('SDI_OUT_P')] p1: minimum=70.00 maximum=80.00
MaxMinImpedance "Schematic Impedance Constraint_1" [InNet('NetC76_2')] p2: minimum=70.00 maximum=80.00
MaxMinImpedance "Schematic Impedance Constraint" [InNetClass('JTAG')] p3: minimum=45.00 maximum=55.00
MinimumSolderMaskSliver [All] p1: minsoldermaskwidth=3.94
PolygonConnect [All] p1: thpad.connectstyle=Relief thpad.reliefconductorwidth=10 thpad.reliefentries=4 thpad.polygonreliefangle="90 Angle" thpad.airgapwidth=10 smdpad.connectstyle=Relief smdpad.reliefconductorwidth=10 smdpad.reliefentries=4 smdpad.polygonreliefangle="90 Angle" smdpad.airgapwidth=10 via.connectstyle=Direct via.reliefconductorwidth=10 via.reliefentries=4 via.polygonreliefangle="90 Angle" via.airgapwidth=10
RoutingTopology RoutingTopology_DDRAddressAndControls [InNetClass('DDR_AddressAndControls')] p1: topology=Daisy_Simple
RoutingTopology [All] p2: topology=Shortest
RoutingVias [All] p1: holewidth=7.87 width=13.78 viastyle="Through Hole" minholewidth=7.87 minwidth=11.81 maxholewidth=7.87 maxwidth=13.78
SilkToSilkClearance [All] p1: silktosilkclearance=0
SilkToSolderMaskClearance [IsPad] p1: minsilkscreentomaskgap=3.94 clearancetoexposedcopper=TRUE
SolderMaskExpansion [All] p1: expansion=4 istentingtop=FALSE
SupplyNets "Schematic Supply Nets_6" [InNet('BODY')] p1: voltage=0.000
SupplyNets "Schematic Supply Nets_11" [InNet('VIN')] p2: voltage=0.000
SupplyNets "Schematic Supply Nets_9" [InNet('+1V35')] p3: voltage=0.000
SupplyNets "Schematic Supply Nets_8" [InNet('AGND')] p4: voltage=0.000
SupplyNets "Schematic Supply Nets_7" [InNet('+1V0')] p5: voltage=0.000
SupplyNets "Schematic Supply Nets_5" [InNet('+1V8')] p6: voltage=0.000
SupplyNets "Schematic Supply Nets_1" [InNet('AVCC')] p7: voltage=0.000
SupplyNets "Schematic Supply Nets_10" [InNet('GND')] p8: voltage=0.000
SupplyNets "Schematic Supply Nets_4" [InNet('+2V5')] p9: voltage=0.000
SupplyNets "Schematic Supply Nets_3" [InNet('VTT')] p10: voltage=0.000
SupplyNets "Schematic Supply Nets_2" [InNet('VTTREF')] p11: voltage=0.000
SupplyNets "Schematic Supply Nets" [InNet('+3V3')] p12: voltage=0.000
Width Width_S50 [InNetClass('S50')] p1: maxlimit=6.41 minlimit=4.22 preferedwidth=4.72 toplayer_minwidth=6.41 toplayer_prefwidth=6.41 midlayer1_minwidth=4.7 midlayer1_maxwidth=4.7 midlayer1_prefwidth=4.7 midlayer2_minwidth=4.72 midlayer2_maxwidth=4.72 midlayer3_minwidth=4.7 midlayer3_maxwidth=4.7 midlayer3_prefwidth=4.7 midlayer4_maxwidth=4.22 midlayer4_prefwidth=4.22 midlayer5_maxwidth=4.22 midlayer5_prefwidth=4.22 midlayer7_minwidth=4.72 midlayer7_maxwidth=4.72 bottomlayer_minwidth=6.41 bottomlayer_prefwidth=6.41 impedanceprofiledriven=TRUE impedanceprofileid={5CB54D78-699D-4C28-AD0A-8973FD01E733} impedanceprofilevalue=50.000000 minimp=50.000000 maximp=50.000000 favimp=50.000000
Width Width_JTAG [InNetClass('JTAG')] p2: maxlimit=6.41 minlimit=4.22 preferedwidth=4.72 toplayer_minwidth=6.41 toplayer_prefwidth=6.41 midlayer1_minwidth=4.7 midlayer1_maxwidth=4.7 midlayer1_prefwidth=4.7 midlayer2_minwidth=4.72 midlayer2_maxwidth=4.72 midlayer3_minwidth=4.7 midlayer3_maxwidth=4.7 midlayer3_prefwidth=4.7 midlayer4_maxwidth=4.22 midlayer4_prefwidth=4.22 midlayer5_maxwidth=4.22 midlayer5_prefwidth=4.22 midlayer7_minwidth=4.72 midlayer7_maxwidth=4.72 bottomlayer_minwidth=6.41 bottomlayer_prefwidth=6.41 impedanceprofiledriven=TRUE impedanceprofileid={5CB54D78-699D-4C28-AD0A-8973FD01E733} impedanceprofilevalue=50.000000 minimp=50.000000 maximp=50.000000 favimp=50.000000
Width Width_Ethernet [InNetClass('ETHERNET')] p3: maxlimit=6.41 minlimit=4.22 preferedwidth=4.72 toplayer_minwidth=6.41 toplayer_prefwidth=6.41 midlayer1_minwidth=4.7 midlayer1_maxwidth=4.7 midlayer1_prefwidth=4.7 midlayer2_minwidth=4.72 midlayer2_maxwidth=4.72 midlayer3_minwidth=4.7 midlayer3_maxwidth=4.7 midlayer3_prefwidth=4.7 midlayer4_maxwidth=4.22 midlayer4_prefwidth=4.22 midlayer5_maxwidth=4.22 midlayer5_prefwidth=4.22 midlayer7_minwidth=4.72 midlayer7_maxwidth=4.72 bottomlayer_minwidth=6.41 bottomlayer_prefwidth=6.41 impedanceprofiledriven=TRUE impedanceprofileid={5CB54D78-699D-4C28-AD0A-8973FD01E733} impedanceprofilevalue=50.000000 minimp=50.000000 maximp=50.000000 favimp=50.000000
Width Width_FLASH [InNetClass('FLASH')] p4: maxlimit=6.41 minlimit=4.22 preferedwidth=4.72 toplayer_minwidth=6.41 toplayer_prefwidth=6.41 midlayer1_minwidth=4.7 midlayer1_maxwidth=4.7 midlayer1_prefwidth=4.7 midlayer2_minwidth=4.72 midlayer2_maxwidth=4.72 midlayer3_minwidth=4.7 midlayer3_maxwidth=4.7 midlayer3_prefwidth=4.7 midlayer4_maxwidth=4.22 midlayer4_prefwidth=4.22 midlayer5_maxwidth=4.22 midlayer5_prefwidth=4.22 midlayer7_minwidth=4.72 midlayer7_maxwidth=4.72 bottomlayer_minwidth=6.41 bottomlayer_prefwidth=6.41 impedanceprofiledriven=TRUE impedanceprofileid={5CB54D78-699D-4C28-AD0A-8973FD01E733} impedanceprofilevalue=50.000000 minimp=50.000000 maximp=50.000000 favimp=50.000000
Width Width_DDR [(InNetClass('DDR-DQS')   OR InNetClass('DDR-AC'))] p5: maxlimit=9.75 minlimit=6.58 preferedwidth=7.34 toplayer_minwidth=9.75 toplayer_prefwidth=9.75 midlayer1_minwidth=7.32 midlayer1_maxwidth=7.32 midlayer1_prefwidth=7.32 midlayer2_minwidth=7.34 midlayer2_maxwidth=7.34 midlayer3_minwidth=7.32 midlayer3_maxwidth=7.32 midlayer3_prefwidth=7.32 midlayer4_maxwidth=6.58 midlayer4_prefwidth=6.58 midlayer5_maxwidth=6.58 midlayer5_prefwidth=6.58 midlayer7_minwidth=7.34 midlayer7_maxwidth=7.34 bottomlayer_minwidth=9.75 bottomlayer_prefwidth=9.75 impedanceprofiledriven=TRUE impedanceprofileid={EA601F0F-DD40-403B-BA79-0BBDBBF6793B} impedanceprofilevalue=40.000000 minimp=50.000000 maximp=50.000000 favimp=50.000000
Width [All] p6: maxlimit=20 minlimit=3 preferedwidth=10
23 further rules are at their usual default settings.

## Classes and differential pairs
component class Mechanical: Fid1 Fid2 Fid3 Fid4 M2 M3 M4 M5
net class DDR3_A[15..0]: DDR3_A0 DDR3_A1 DDR3_A2 DDR3_A3 DDR3_A4 DDR3_A5 DDR3_A6 DDR3_A7 DDR3_A8 DDR3_A9 DDR3_A10 DDR3_A11 DDR3_A12 DDR3_A13 DDR3_A14 DDR3_A15
net class S50: DDR3_PLLCLK
differential pair class SDI100: EQ_SDO OPTIC_TD RXIN1 SFP_TX
net class DDR-TERM: DDR3_A0 DDR3_A1 DDR3_A2 DDR3_A3 DDR3_A4 DDR3_A5 DDR3_A6 DDR3_A7 DDR3_A8 DDR3_A9 DDR3_A10 DDR3_A11 DDR3_A12 DDR3_A13 DDR3_A14 DDR3_A15 DDR3_BA0 DDR3_BA1 DDR3_BA2 DDR3_CAS DDR3_CKE0 DDR3_ODT0 DDR3_RAS DDR3_S0 DDR3_WE
net class JTAG: F_TCK F_TDI F_TDO F_TMS
component class POWER: C1 C2 C3 C4 C5 C6 C7 C8 C9 C10 C11 C12 C13 C14 C15 C16 C17 C18 C19 C20 C21 C22 C133 C146 C159 C160 C161 J4 LED2 Q1 Q2 R1 R2 R3 R4 R5 R6 R7 R8 R9 R10 R11 R12 R34 R68 R69 R74 R75 R77 R78 TP1 TP2 TP3 TP4 TP5 U5 U11 U12 U13 U14 U15
component class FLASH: C26 R15 R? U6
component class CONFIG: C30 D1 J3 LED3 Q3 R16 R17 R79 R80
net class LVDS_TX: B34_L7_N B34_L7_P B34_L8_N B34_L8_P B34_L9_N B34_L9_P B34_L10_N B34_L10_P B34_L11_N B34_L11_P B34_L12_N B34_L12_P
net class LVDS_RX: B34_L1_N B34_L1_P B34_L2_N B34_L2_P B34_L3_N B34_L3_P B34_L4_N B34_L4_P B34_L5_N B34_L5_P B34_L6_N B34_L6_P
net class ETH_TX_D[3..0]: ETH_TX_D0 ETH_TX_D1 ETH_TX_D2 ETH_TX_D3
net class ETH_RX_D[3..0]: ETH_RX_D0 ETH_RX_D1 ETH_RX_D2 ETH_RX_D3
component class SERIALIZER: C59 C60 C61 C62 C63 C76 C77 C100 C101 C102 C110 C148 C152 J2 L2 R63 R64 R65 R66 R67 R70 R71 R72 R73 SB3 U3
component class OPTICAL: C151 C153 C154 C155 C156 C157 J5 L3 L4 M1 Q4 R38 R81 R82 R83 R84 R85 R86 R87 R89 R90 R103 SB4 SB5 SB6
component class EQUALIZER: C52 C53 C129 C139 C141 J1 L1 R56 R57 R58 R59 R60 R61 R62 U2
component class DESERIALIZER: C57 C113 C119 C130 C131 C132 C134 C135 C136 C137 C138 R30 R31 R54 R55 R97 R98 R99 R100 R101 R102 SB1 SB2 U4
net class FLASH: NetIC7_A4 SPI_CS SPI_DQ0 SPI_DQ1 SPI_DQ2 SPI_DQ3 SPI_SCK
net class ETHERNET: ETH_COL ETH_CRS_DV ETH_INT ETH_LINK ETH_MDC ETH_MDIO ETH_RST ETH_RX_D0 ETH_RX_D1 ETH_RX_D2 ETH_RX_D3 ETH_RX_DV ETH_RX_ER ETH_RXCLK ETH_TX_D0 ETH_TX_D1 ETH_TX_D2 ETH_TX_D3 ETH_TX_EN ETH_TXCLK NetIC10_25 NetIC10_26 NetIC10_28
net class DDR3_D[7..0]: DDR3_D0 DDR3_D1 DDR3_D2 DDR3_D3 DDR3_D4 DDR3_D5 DDR3_D6 DDR3_D7
component class ETHERNET: C33 C34 C35 C37 C39 C40 C41 C42 C43 C44 C45 C47 C48 C49 C50 C51 C55 C56 R25 R26 R27 R28 R29 R32 R35 R37 R53 T1 U10 Y2
component class DDR3L: C23 C24 C25 C128 C163 C164 C165 C166 C167 C168 C171 C172 C173 C174 C175 C176 C177 C178 C181 C182 C183 C184 C185 C186 C187 C188 C189 C190 C191 C192 R18 R19 R20 R21 RN1 RN2 RN3 RN4 RN5 RN6 U8 U9
component class BANK35: C27 C28 C29 C54 C85 C86 C87 C88 C89 C90 C162 Y1
component class BANK34: C31 C32 C91 C92 C93 C94 C95 C96 C97 C98 C149 C150 R22 R23 R24 R33 U1 U16
component class BANK16: C75 C78 J6
component class BANK14: C36 C38 C46 C79 C80 C81 C82 C83 C84 C193 C194 LED1 R13 R14 R36 Y3
differential pair SDI_CLK: +SDI_CLK_P -SDI_CLK_N
differential pair SFP_TX: +SFP_TX_P -SFP_TX_N
differential pair B34_L12: +B34_L12_P -B34_L12_N
differential pair B34_L11: +B34_L11_P -B34_L11_N
differential pair B34_L10: +B34_L10_P -B34_L10_N
differential pair B34_L9: +B34_L9_P -B34_L9_N
differential pair B34_L8: +B34_L8_P -B34_L8_N
differential pair B34_L7: +B34_L7_P -B34_L7_N
differential pair B34_L6: +B34_L6_P -B34_L6_N
differential pair B34_L5: +B34_L5_P -B34_L5_N
differential pair B34_L4: +B34_L4_P -B34_L4_N
differential pair B34_L3: +B34_L3_P -B34_L3_N
differential pair B34_L2: +B34_L2_P -B34_L2_N
differential pair B34_L1: +B34_L1_P -B34_L1_N
differential pair SDI_IN: +SDI_IN_P -SDI_IN_N
differential pair OPTIC_TD: +OPTIC_TD_P -OPTIC_TD_N
differential pair EQ_SDO: +EQ_SDO_P -EQ_SDO_N
differential pair DDR3_DQS0: +DDR3_DQS0_P -DDR3_DQS0_N
differential pair DDR3_CLK0: +DDR3_CLK0_P -DDR3_CLK0_N
differential pair TD: +TD_P -TD_N
differential pair RD: +RD_P -RD_N

## Components (designator, comment, footprint, x,y, rotation, side; value= is the part's Value field where it differs from the comment)
C1 "C1608X5R0J226M080AC" CAPC1608X100X20LL10 2692.12,-366.09 r270 top value=22µ
C2 "C1608X5R0J226M080AC" CAPC1608X100X20LL10 2692.12,-254.08 r90 top value=22µ
C3 "C1608X5R0J226M080AC" CAPC1608X100X20LL10 1778.87,10.38 r180 top value=22u
C4 "C1608X5R0J226M080AC" CAPC1608X100X20LL10 1760.73,-160.29 r180 top value=22u
C5 "CGA2B2C0G1H3R3C050BA" CAPC1005X55N 1675.54,-119.85 r90 top value=3p3
C6 "C1608X5R0J226M080AC" CAPC1608X100X20LL10 2762.59,-222.58 r180 top value=22µ
C7 "C1608X5R0J226M080AC" CAPC1608X100X20LL10 2762.59,-397.58 r180 top value=22µ
C8 "C1005X7R1H104K050BB" FP-C1005-050-0_05-IPC_C 2908.52,-301.77 r180 top value=100n
C9 "C1005X7S2A103K050BB" FP-C1005-050-0_05-IPC_C 2845.84,-218.95 r90 top value=10n
C10 "C1005X7R1H104K050BB" FP-C1005-050-0_05-IPC_C 2383.99,-59.88 r180 top value=100n
C11 "C1608X5R0J226M080AC" CAPC1608X100X20LL10 2397.99,-4.62 r0 top value=22µ
C12 "C1608X5R0J226M080AC" CAPC1608X100X20LL10 2393.07,-124.88 r0 top value=22µ
C13 "C1608X5R0J226M080AC" CAPC1608X100X20LL10 2679.13,42.06 r90 top value=22u
C14 "C1608X5R0J226M080AC" CAPC1608X100X20LL10 2608.06,-98.51 r180 top value=22u
C15 "C1005X7R1H104K050BB" FP-C1005-050-0_05-IPC_C 2017.58,-71.39 r90 top value=100n
C16 "C3216X5R0G107M160AB" FP-C3216-160-0_3-IPC_B 1922.46,-53.1 r270 top value=100u
C17 "CGA2B2C0G1H3R3C050BA" CAPC1005X55N 2512.3,-58.3 r90 top value=3p3
C18 "C1005C0G1H390J050BA" FP-C1005-050-0_05-IPC_C 2218.48,-174.77 r180 top value=39p
C19 "C1005X5R1A105K050BB" CAPC1005X55X10NL05 2227,68.51 r0 top value=1µ
C20 "C1005X7S2A103K050BB" FP-C1005-050-0_05-IPC_C 2295.7,-174.99 r180 top value=10n
C21 "C3216X5R0G107M160AB" FP-C3216-160-0_3-IPC_B 2038.82,-273.78 r90 top value=100u
C22 "C3216X5R0G107M160AB" FP-C3216-160-0_3-IPC_B 1922.46,-273.57 r90 top value=100u
C23 "C1608JB0J106K080AB" FP-C1608-080-0_1-IPC_C 617.84,-436.62 r270 top value=10u
C24 "C1608JB0J106K080AB" FP-C1608-080-0_1-IPC_C 617.02,-321.05 r270 top value=10u
C25 "C1005X5R1E474K050BB" FP-C1005-050-0_05-IPC_C 477.72,-306.96 r180 top value=470n
C26 "C1005X5R1E474K050BB" FP-C1005-050-0_05-IPC_C 2146.3,-647.08 r180 bottom value=470n
C27 "C1005X5R1E474K050BB" FP-C1005-050-0_05-IPC_C 1403.95,-554.61 r0 bottom value=470n
C28 "C1005NP01H330J050BA" FP-C1005-050-0_05-IPC_C 1248.25,-555.79 r0 bottom value=33p
C29 "C1005X5R1E474K050BB" FP-C1005-050-0_05-IPC_C 1142.88,-454.65 r180 bottom value=470n
C30 "C1005X5R1E474K050BB" FP-C1005-050-0_05-IPC_C 1545.74,-894.89 r315 bottom value=470n
C31 "C1005X7R1H104K050BB" FP-C1005-050-0_05-IPC_C 1344.2,-1516.5 r0 top value=100n
C32 "C1005C0G1H101J050BA" FP-C1005-050-0_05-IPC_C 1296.89,-1495.87 r270 top value=100p
C33 "C1005X7R1H104K050BB" FP-C1005-050-0_05-IPC_C 2114.36,-1074.19 r270 top value=100n
C34 "C1005X7R1H104K050BB" FP-C1005-050-0_05-IPC_C 1985.23,-1374.44 r90 top value=100n
C35 "C1005X7R1H104K050BB" FP-C1005-050-0_05-IPC_C 2059.28,-1133.73 r0 top value=100n
C36 "C1005X7R1H104K050BB" FP-C1005-050-0_05-IPC_C 1754.51,-1051.52 r90 bottom value=100n
C37 "C1608JB0J106K080AB" FP-C1608-080-0_1-IPC_C 1987.31,-1094.36 r90 bottom value=10u
C38 "C1005X7R1H104K050BB" FP-C1005-050-0_05-IPC_C 1804.64,-1050.76 r90 bottom value=100n
C39 "C1608JB0J106K080AB" FP-C1608-080-0_1-IPC_C 1960.54,-1163.64 r180 bottom value=10u
C40 "C1005X5R1E474K050BB" FP-C1005-050-0_05-IPC_C 1794.17,-1340.62 r90 top value=470n
C41 "C1608JB0J106K080AB" FP-C1608-080-0_1-IPC_C 2052.86,-1084.28 r180 top value=10u
C42 "C1005X7S2A103K050BB" FP-C1005-050-0_05-IPC_C 2025.02,-1165.03 r270 bottom value=10n
C43 "C1005C0G2A102J050BC" FP-C1005-050-0_05-IPC_C 2055.79,-1165.49 r270 bottom value=1n
C44 "C1005C0G1H101J050BA" FP-C1005-050-0_05-IPC_C 2093.17,-1195.1 r90 bottom value=100p
C45 "C1005X7S2A103K050BB" FP-C1005-050-0_05-IPC_C 2031.51,-1227.49 r180 bottom value=10n
C46 "C1005X7R1H104K050BB" FP-C1005-050-0_05-IPC_C 1840.7,-1051.59 r270 bottom value=100n
C47 "C1005C0G2A102J050BC" FP-C1005-050-0_05-IPC_C 2032.41,-1257.54 r180 bottom value=1n
C48 "C1005C0G1H101J050BA" FP-C1005-050-0_05-IPC_C 2032.91,-1287.27 r180 bottom value=100p
C49 "C1005X7R1H104K050BB" FP-C1005-050-0_05-IPC_C 2519.41,-1017.53 r180 bottom value=100n
C50 "C1005X7R1H104K050BB" FP-C1005-050-0_05-IPC_C 2343.79,-862.46 r270 bottom value=100n
C51 "C1005X7R1H473K050BB" FP-C1005-050-0_05-IPC_C 3012.85,-96.78 r270 bottom value=47n
C52 "C1005X7R1H104K050BB" FP-C1005-050-0_05-IPC_C 422.71,-1206.58 r180 top value=100n
C53 "C1005X7R1H104K050BB" FP-C1005-050-0_05-IPC_C 572.35,-1211.37 r0 top value=100n
C54 "C1005X5R1E474K050BB" FP-C1005-050-0_05-IPC_C 1401.11,-477.78 r270 bottom value=470n
C55 "C1005X7R1H104K050BB" FP-C1005-050-0_05-IPC_C 2521.11,-898.84 r180 bottom value=100n
C56 "C1005X7R1H104K050BB" FP-C1005-050-0_05-IPC_C 2343.79,-1055.26 r90 bottom value=100n
C57 "GCM155R71E333KA55D" FP-GCM155-0_05-MFG 792.27,-1582.98 r180 top value=33n
C59 "C1005X7R1H104K050BB" FP-C1005-050-0_05-IPC_C 762.49,-1851.45 r0 bottom value=100n
C60 "C1005X7R1H104K050BB" FP-C1005-050-0_05-IPC_C 867.7,-1808.63 r270 bottom value=100n
C61 "C1005X7R1H104K050BB" FP-C1005-050-0_05-IPC_C 762.51,-1911.34 r0 bottom value=100n
C62 "C1005X7R1H104K050BB" FP-C1005-050-0_05-IPC_C 764.07,-2032.68 r90 bottom value=100n
C63 "C1005X7R1H104K050BB" FP-C1005-050-0_05-IPC_C 951.87,-2040.42 r135 bottom value=100n
C75 "C2012X5R1A476M125AC" FP-C2012-125-0_2-IPC_C 1603.77,-371.05 r0 bottom value=47u
C76 "C1005X5R1A475K050BE" FP-C1005-050-0_20-0_10-IPC_C 542.72,-1862.97 r180 top value=4u7
C77 "C1005X5R1A475K050BE" FP-C1005-050-0_20-0_10-IPC_C 610.31,-1899.24 r0 top value=4u7
C78 "C1005X5R1E474K050BB" FP-C1005-050-0_05-IPC_C 1593.7,-428.24 r0 bottom value=470n
C79 "C1005X5R1E474K050BB" FP-C1005-050-0_05-IPC_C 1657.96,-868.11 r0 bottom value=470n
C80 "C1005X5R1E474K050BB" FP-C1005-050-0_05-IPC_C 1656.71,-808.34 r180 bottom value=470n
C81 "C1005X5R1E474K050BB" FP-C1005-050-0_05-IPC_C 1760.65,-794.28 r135 bottom value=470n
C82 "C2012X5R1A476M125AC" FP-C2012-125-0_2-IPC_C 1903.91,-804.44 r90 bottom value=47u
C83 "C1005X5R1E474K050BB" FP-C1005-050-0_05-IPC_C 1814.35,-773.57 r270 bottom value=470n
C84 "C1005X5R1E474K050BB" FP-C1005-050-0_05-IPC_C 1703.36,-944.47 r180 bottom value=470n
C85 "C2012X5R1A476M125AC" FP-C2012-125-0_2-IPC_C 1452.63,-346.73 r0 bottom value=47u
C86 "C1005X5R1E474K050BB" FP-C1005-050-0_05-IPC_C 1388.47,-600.32 r270 bottom value=470n
C87 "C1005X5R1E474K050BB" FP-C1005-050-0_05-IPC_C 1334.03,-613.15 r90 bottom value=470n
C88 "C1005X5R1A475K050BE" FP-C1005-050-0_20-0_10-IPC_C 1273.65,-733.7 r90 bottom value=4u7
C89 "C1005NP01H330J050BA" FP-C1005-050-0_05-IPC_C 1346.78,-544.64 r270 bottom value=33p
C90 "C1005X5R1E474K050BB" FP-C1005-050-0_05-IPC_C 1337.36,-459.01 r270 bottom value=470n
C91 "C1005X5R1E474K050BB" FP-C1005-050-0_05-IPC_C 1349.75,-893.96 r45 bottom value=470n
C92 "C1005X5R1E474K050BB" FP-C1005-050-0_05-IPC_C 1382.32,-974.26 r225 bottom value=470n
C93 "C2012X5R1A476M125AC" FP-C2012-125-0_2-IPC_C 1566.47,-983.75 r45 bottom value=47u
C94 "C1005X5R1A475K050BE" FP-C1005-050-0_20-0_10-IPC_C 1523.88,-946.55 r45 bottom value=4u7
C95 "C1005X5R1E474K050BB" FP-C1005-050-0_05-IPC_C 1299.17,-825.37 r225 bottom value=470n
C96 "C1005X5R1E474K050BB" FP-C1005-050-0_05-IPC_C 1410.86,-702.59 r45 bottom value=470n
C97 "C1005X5R1E474K050BB" FP-C1005-050-0_05-IPC_C 1414.24,-879.96 r225 bottom value=470n
C98 "C1005X5R1E474K050BB" FP-C1005-050-0_05-IPC_C 1472.1,-950.49 r135 bottom value=470n
C99 "C1005X5R1A475K050BE" FP-C1005-050-0_20-0_10-IPC_C 1516.67,-567.67 r135 bottom value=4u7
C100 "C1005X7R1H104K050BB" FP-C1005-050-0_05-IPC_C 770.38,-2127.94 r90 top value=100n
C101 "C1005X5R1A475K050BE" FP-C1005-050-0_20-0_10-IPC_C 762.08,-1815.62 r180 bottom value=4u7
C102 "C1005X7R1H104K050BB" FP-C1005-050-0_05-IPC_C 991.87,-2030.42 r135 bottom value=100n
C103 "C2012X5R1A476M125AC" FP-C2012-125-0_2-IPC_C 1887.39,-466.74 r270 bottom value=47u
C104 "C1005X5R1A475K050BE" FP-C1005-050-0_20-0_10-IPC_C 1677.53,-574.24 r0 bottom value=4u7
C105 "C1005X5R1A475K050BE" FP-C1005-050-0_20-0_10-IPC_C 1623.48,-756.9 r225 bottom value=4u7
C106 "C1005X5R1E474K050BB" FP-C1005-050-0_05-IPC_C 1557.94,-655.55 r270 bottom value=470n
C107 "C1005X5R1E474K050BB" FP-C1005-050-0_05-IPC_C 1665.29,-706.74 r45 bottom value=470n
C108 "C1005X5R1E474K050BB" FP-C1005-050-0_05-IPC_C 1660.44,-650.18 r270 bottom value=470n
C109 "C1005X5R1E474K050BB" FP-C1005-050-0_05-IPC_C 1670.96,-599.38 r0 bottom value=470n
C110 "C1005X7R1H104K050BB" FP-C1005-050-0_05-IPC_C 972.08,-1810.62 r270 bottom value=100n
C111 "C1005X5R1E474K050BB" FP-C1005-050-0_05-IPC_C 1545,-745.06 r0 bottom value=470n
C112 "C1005X5R1E474K050BB" FP-C1005-050-0_05-IPC_C 1604.71,-696.27 r90 bottom value=470n
C113 "C1005X5R1A475K050BE" FP-C1005-050-0_20-0_10-IPC_C 732.08,-1540.62 r180 bottom value=4u7
C114 "C1005X5R1E474K050BB" FP-C1005-050-0_05-IPC_C 1482.44,-589.83 r0 bottom value=470n
C115 "C1005X5R1E474K050BB" FP-C1005-050-0_05-IPC_C 1452.41,-724.68 r0 bottom value=470n
C116 "C1005X5R1E474K050BB" FP-C1005-050-0_05-IPC_C 1545.92,-783.21 r0 bottom value=470n
C117 "C1005X5R1E474K050BB" FP-C1005-050-0_05-IPC_C 1541.14,-615.36 r180 bottom value=470n
C118 "C1005X5R1E474K050BB" FP-C1005-050-0_05-IPC_C 1458.88,-758.47 r0 bottom value=470n
C119 "C1005X5R1A475K050BE" FP-C1005-050-0_20-0_10-IPC_C 1043.84,-1527.35 r0 bottom value=4u7
C120 "C1005X5R1E474K050BB" FP-C1005-050-0_05-IPC_C 1445.28,-791.38 r0 bottom value=470n
C121 "C1005X5R1E474K050BB" FP-C1005-050-0_05-IPC_C 1496.46,-680.61 r270 bottom value=470n
C122 "C1005X5R1E474K050BB" FP-C1005-050-0_05-IPC_C 1456.41,-643 r0 bottom value=470n
C123 "C1005X5R1E474K050BB" FP-C1005-050-0_05-IPC_C 1418.6,-825.91 r0 bottom value=470n
C124 "C1005X5R1E474K050BB" FP-C1005-050-0_05-IPC_C 1546,-820.25 r180 bottom value=470n
C125 "C2012X5R1A476M125AC" FP-C2012-125-0_2-IPC_C 1632.12,-531.27 r45 bottom value=47u
C126 "C1005X5R1E474K050BB" FP-C1005-050-0_05-IPC_C 1604.41,-607.99 r315 bottom value=470n
C127 "C1005X5R1E474K050BB" FP-C1005-050-0_05-IPC_C 1563.19,-532.68 r90 bottom value=470n
C128 "C1005X7R1H104K050BB" FP-C1005-050-0_05-IPC_C 405.49,-386.64 r90 top value=100n
C129 "C1005X5R1A105K050BB" CAPC1005X55X10LL05 353.72,-1306.97 r270 top value=1u
C130 "C1005X7R1H104K050BB" FP-C1005-050-0_05-IPC_C 947.31,-1485.38 r90 bottom value=100n
C131 "C1005X7R1H104K050BB" FP-C1005-050-0_05-IPC_C 772.08,-1500.62 r90 bottom value=100n
C132 "C1005X7R1H104K050BB" FP-C1005-050-0_05-IPC_C 866.61,-1264.83 r270 bottom value=100n
C133 "C1608JB0J106K080AB" FP-C1608-080-0_1-IPC_C 2984.41,-7.99 r90 top value=10u
C134 "C1005X7R1H104K050BB" FP-C1005-050-0_05-IPC_C 756.96,-1375.38 r0 bottom value=100n
C135 "C1005X7R1H104K050BB" FP-C1005-050-0_05-IPC_C 967.23,-1279.27 r270 bottom value=100n
C136 "C1005X7R1H104K050BB" FP-C1005-050-0_05-IPC_C 1000.38,-1485.39 r90 bottom value=100n
C137 "C1005X7R1H104K050BB" FP-C1005-050-0_05-IPC_C 756.2,-1313.69 r0 bottom value=100n
C138 "C1608X5R0J226M080AC" CAPC1608X100X20LL10 851.31,-1493.69 r270 bottom value=22µ
C139 "C1005X5R1A105K050BB" CAPC1005X55X10LL05 353.74,-1378.15 r90 top value=1u
C141 "C1005X5R1A105K050BB" CAPC1005X55X10LL05 450.78,-1480.62 r0 top value=1u
C146 "C1005X7S2A103K050BB" FP-C1005-050-0_05-IPC_C 2734.6,74.13 r180 top value=10n
C148 "C1005X5R1A475K050BE" FP-C1005-050-0_20-0_10-IPC_C 987.08,-1970.62 r180 bottom value=4u7
C149 "C1005X7R1H104K050BB" FP-C1005-050-0_05-IPC_C 1355.47,-1154.37 r0 bottom value=100n
C150 "C1005X7R1H104K050BB" FP-C1005-050-0_05-IPC_C 1401.74,-1177.38 r90 bottom value=100n
C151 "C1005X7R1H104K050BB" FP-C1005-050-0_05-IPC_C 1786.17,-1657.21 r0 bottom value=100n
C152 "C1608X5R0J226M080AC" CAPC1608X100X20LL10 828.56,-2020.67 r90 bottom value=22µ
C153 "C1608X5R0J226M080AC" CAPC1608X100X20LL10 1732.18,-1835.8 r270 bottom value=22µ
C154 "C1005X7R1H104K050BB" FP-C1005-050-0_05-IPC_C 1690.26,-1821.77 r90 bottom value=100n
C155 "C1005X7R1H104K050BB" FP-C1005-050-0_05-IPC_C 1690.46,-1761.08 r270 bottom value=100n
C156 "C1608X5R0J226M080AC" CAPC1608X100X20LL10 1731.58,-1746.03 r90 bottom value=22µ
C157 "C1005X7R1H104K050BB" FP-C1005-050-0_05-IPC_C 1784.56,-1924.34 r0 bottom value=100n
C159 "C1608X5R0J226M080AC" CAPC1608X100X20NL10 2900.63,-588.68 r90 top value=22u
C160 "C1608X5R0J226M080AC" CAPC1608X100X20LL10 2717.8,-587.61 r90 top value=22u
C161 "CGA2B2C0G1H3R3C050BA" CAPC1005X55N 2766.58,-491.79 r0 top value=3p3
C162 "C1005X5R1E474K050BB" FP-C1005-050-0_05-IPC_C 1444.45,-417.69 r0 bottom value=470n
C163 "C1005X5R1A105K050BB" CAPC1005X55X10NL05 668.33,-398.21 r90 bottom value=1µ
C164 "C1005X5R1A475K050BE" FP-C1005-050-0_20-0_10-IPC_C 712.09,-402.59 r90 bottom value=4u7
C165 "C1005X7R1H104K050BB" FP-C1005-050-0_05-IPC_C 403.71,-691.83 r0 bottom value=100n
C166 "C1005X7R1H104K050BB" FP-C1005-050-0_05-IPC_C 910.49,-702.61 r270 bottom value=100n
C167 "C1005X7R1H104K050BB" FP-C1005-050-0_05-IPC_C 997.23,-703.2 r270 bottom value=100n
C168 "C1005X7R1H104K050BB" FP-C1005-050-0_05-IPC_C 626.32,-406.97 r270 bottom value=100n
C171 "C1005X7R1H104K050BB" FP-C1005-050-0_05-IPC_C 401.46,-821.8 r0 bottom value=100n
C172 "C1005X7R1H104K050BB" FP-C1005-050-0_05-IPC_C 403.71,-928.52 r0 bottom value=100n
C173 "C1005X5R1A475K050BE" FP-C1005-050-0_20-0_10-IPC_C 805.11,-476.78 r180 bottom value=4u7
C174 "C1005X5R1E474K050BB" FP-C1005-050-0_05-IPC_C 579.7,-577.88 r90 bottom value=470n
C175 "C1005X5R1A475K050BE" FP-C1005-050-0_20-0_10-IPC_C 582.07,-486.43 r180 bottom value=4u7
C176 "C1005X5R1E474K050BB" FP-C1005-050-0_05-IPC_C 807.75,-510.05 r180 bottom value=470n
C177 "C1005X7S2A103K050BB" FP-C1005-050-0_05-IPC_C 790.8,-804.04 r180 bottom value=10n
C178 "C1005X7S2A103K050BB" FP-C1005-050-0_05-IPC_C 516.81,-647.79 r180 bottom value=10n
C181 "C1005X7R1H473K050BB" FP-C1005-050-0_05-IPC_C 807.5,-543.56 r180 bottom value=47n
C182 "C1005X7R1H473K050BB" FP-C1005-050-0_05-IPC_C 842.86,-623.3 r90 bottom value=47n
C183 "C1005X7R1H473K050BB" FP-C1005-050-0_05-IPC_C 799.11,-713.58 r45 bottom value=47n
C184 "C1005X7R1H473K050BB" FP-C1005-050-0_05-IPC_C 831.12,-788.76 r90 bottom value=47n
C185 "C1005X7R1H473K050BB" FP-C1005-050-0_05-IPC_C 871.43,-873.87 r0 bottom value=47n
C186 "C1005X7R1H473K050BB" FP-C1005-050-0_05-IPC_C 611.35,-542.31 r270 bottom value=47n
C187 "C1005X7R1H473K050BB" FP-C1005-050-0_05-IPC_C 779.14,-618.92 r0 bottom value=47n
C188 "C1005X7R1H473K050BB" FP-C1005-050-0_05-IPC_C 547.63,-574.39 r90 bottom value=47n
C189 "C1005X7R1H473K050BB" FP-C1005-050-0_05-IPC_C 577.76,-636.65 r180 bottom value=47n
C190 "C1005X7R1H473K050BB" FP-C1005-050-0_05-IPC_C 557.04,-803.52 r135 bottom value=47n
C191 "C1005X7R1H473K050BB" FP-C1005-050-0_05-IPC_C 575,-939.52 r270 bottom value=47n
C192 "C1005X7R1H473K050BB" FP-C1005-050-0_05-IPC_C 625.25,-682.88 r135 bottom value=47n
C193 "C1005X5R1A475K050BE" FP-C1005-050-0_20-0_10-IPC_C 1846.03,-809.11 r90 bottom value=4u7
C194 "C1005X5R1E474K050BB" FP-C1005-050-0_05-IPC_C 1814.28,-931.56 r90 bottom value=470n
D1 "PMEG2005AESFYL" FP-PMEG2005AESFYL-MFG 1481.38,-868.63 r180 bottom value=25pF
FB1 "MPZ0603S121HT000" FP-MPZ0603-IPC_C 1606.75,-648.17 r180 bottom
FB2 "MPZ0603S121HT000" FP-MPZ0603-IPC_C 1531.05,-705.08 r90 bottom
Fid1 "Fiducial mark" Fiducial 1751.72,-339.84 r90 top value=N.A.
Fid2 "Fiducial mark" Fiducial 2380.46,-1378.24 r90 top value=N.A.
Fid3 "Fiducial mark" Fiducial 393.7,-590.55 r90 top value=N.A.
Fid4 "Fiducial mark" Fiducial 483.38,-1685.75 r90 top value=N.A.
J1 "BNC7T-J-P-GN-ST-EM1D" SAMTEC_BNC7T-J-P-XX-ST-EM1D -115.21,-869.6 r270 top locked
J2 "BNC7T-J-P-GN-ST-EM1D" SAMTEC_BNC7T-J-P-XX-ST-EM1D -117.06,-1664.82 r270 top
J3 "87832-1020" FP-87832-1020-MFG 398.91,-57.83 r0 top
J4 "5040500291" FP-5040500291-MFG 3139.48,-270.17 r270 top
J5 "2007215-1" 2007215-1 1784.62,-1783.67 r180 top locked
J6 "53398-0371" MOLX-53398-0371_V 37.17,-384.86 r90 top
L1 "LQP03TN3N9B02D" FP-LQP03TG_02-IPC_C 296.92,-1253.7 r0 top value=3n9
L2 "LQP03TN6N8J02D" FP-LQP03TG_02-MFG 609.93,-1831.95 r180 top value=6n8
L3 "DFE252012P-4R7M=P2" FP-DFE252012C-MFG 1800.76,-1731.93 r90 bottom value=4u7
L4 "DFE252012P-4R7M=P2" FP-DFE252012C-MFG 1798.77,-1850.95 r270 bottom value=4u7
LED1 "LTST-C191KFKT" LEDC1608X55N 993.89,-45.65 r90 top value=Orange
LED2 "LTST-C191KFKT" LEDC1608X55N 1106.47,-45.65 r90 top value=Orange
LED3 "LTST-C191KFKT" LEDC1608X55N 879.87,-45.36 r90 top value=Orange
M1 "1888247-1" 1888247-1 1784.62,-1783.67 r0 top
M2 "SMTSO-2540CTJ" SMTSO-2540CTJ 3149.61,-2125.98 r180 bottom
M3 "SMTSO-2540CTJ" SMTSO-2540CTJ 0,-2125.98 r180 bottom
M4 "SMTSO-2540CTJ" SMTSO-2540CTJ 0,0 r180 bottom
M5 "SMTSO-2540CTJ" SMTSO-2540CTJ 3149.61,0 r180 bottom
Q1 "STM6710LWB6F" SOT95P280X145-6N 1393.57,-74.51 r180 top
Q2 "RU1J002YNTCL" FP-UMT3F-MFG 1197.4,-86.35 r180 top
Q3 "RU1J002YNTCL" FP-UMT3F-MFG 788.86,-60.14 r0 top
Q4 "RU1J002YNTCL" FP-UMT3F-MFG 1951.01,-1956.44 r0 bottom
R1 "RC0402FR-07200KL" RESC1005X40X25NL05T10 1637.11,-121.13 r90 top value=200K
R2 "RC0402FR-07100KL" RESC1005X40X25LL05T10 2832.68,-60.6 r180 bottom value=100K
R3 "RC0402FR-07160KL" RESC1005X40X25NL05T10 1676.32,-44.39 r90 top value=160K
R4 "RC0402FR-0724KL" RESC1005X40X25LL05T10 2902.12,-222.58 r90 top value=24K
R5 "RC0402FR-07200KL" RESC1005X40X25LL05T10 2478.4,-56.72 r90 top value=200K
R6 "RC0402FR-0720KL" RESC1005X40X25LL05T10 2226.15,-219.99 r0 top value=20K
R7 "RC0402FR-0730KL" RESC1005X40X25LL05T10 2294.06,-219.99 r0 top value=30K
R8 "RC0402FR-07100KL" RESC1005X40X25LL05T10 2513.62,15.75 r90 top value=100K
R9 "RC0402FR-072K2L" RESC1005X40X25LL05T10 1299.36,-22.35 r270 top value=2K2
R10 "RC0402FR-074K99L" RESC1005X40X25LL05T10 1519.36,-126.88 r90 top value=4K99
R11 "RC0402FR-074K99L" RESC1005X40X25LL05T10 1270.01,-52.57 r270 top value=4K99
R12 "RC0402FR-071K3L" RESC1005X40X25LL05T10 1489.36,-126.88 r90 top value=1K3
R13 "RC0402FR-07240RL" RESC1005X40X25LL05T10 1051.11,3.33 r90 top value=240R
R14 "RC0402FR-07240RL" RESC1005X40X25LL05T10 1052.18,-94.61 r270 top value=240R
R15 "RC0402FR-074K87L" RESC1005X40X25LL05T10 2084.34,-737.27 r180 bottom value=4K87
R16 "RC0402FR-074K87L" RESC1005X40X25LL05T10 1472.35,-892.89 r0 bottom value=4K87
R17 "RC0402FR-073K57L" RESC1005X40X25LL05T10 1547.84,-862.18 r135 bottom value=3K57
R18 "RC0402FR-074K87L" RESC1005X40X25LL05T10 576.24,-970.14 r0 top value=4K87
R19 "RC0402FR-0739RL" RESC1005X40X25LL05T10 728.14,-485.68 r270 bottom value=39R
R20 "RC0402FR-0780R6L" RESC1005X40X25LL05T10 756.26,-714.38 r270 bottom value=80R6
R21 "RC0402FR-07240RL" RESC1005X40X25LL05T10 793.17,-776.71 r0 bottom value=240R
R22 "RC0402FR-075KL" RESC1005X40X25LL05T10 1218.52,-1423.56 r270 top value=5K
R23 "RC0402FR-075KL" RESC1005X40X25LL05T10 1261.21,-1477.27 r90 top value=5K
R24 "RC0402FR-075KL" RESC1005X40X25LL05T10 1502.29,-1403.47 r270 top value=5K
R25 "RC0402FR-0739RL" RESC1005X40X25LL05T10 1959.35,-1325.53 r0 top value=39R
R26 "RC0402FR-074R99L" RESC1005X40X25LL05T10 2361.45,-873.85 r90 top value=49R9
R27 "RC0402FR-074R99L" RESC1005X40X25LL05T10 2326.29,-920.7 r90 top value=49R9
R28 "RC0402FR-074R99L" RESC1005X40X25LL05T10 2361.45,-994.02 r90 top value=49R9
R29 "RC0402FR-074R99L" RESC1005X40X25LL05T10 2326.29,-1041.17 r90 top value=49R9
R30 "RC0402FR-075KL" RESC1005X40X25LL05T10 978.81,-1185.62 r180 top value=5K
R31 "RC0402FR-075KL" RESC1005X40X25LL05T10 855.34,-1185.62 r180 top value=5K
R32 "RC0402FR-07240RL" RESC1005X40X25LL05T10 2368.89,-1218.76 r0 top value=240R
R33 "RC0402FR-075KL" RESC1005X40X25LL05T10 1532.62,-1461.06 r90 top value=5K
R34 "RC0402FR-07100KL" RESC1005X40X25LL05T10 2832.68,-27.99 r180 bottom value=100K
R35 "RC0402FR-071ML" RESC1005X40X25LL05T10 2975.73,-98.75 r270 bottom value=1M
R36 "RC0402FR-074K99L" RESC1005X40X25LL05T10 1869.4,-1253.15 r180 bottom value=4K99
R37 "RC0402FR-074K87L" RESC1005X40X25LL05T10 2013.28,-1151.14 r270 top value=4K87
R38 "RC0402FR-07100RL" RESC1005X40X25LL05T10 1494.27,-1851.38 r0 top value=100
R53 "RC0402FR-07240RL" RESC1005X40X25LL05T10 2357.83,-735.35 r0 top value=240R
R54 "RC0402FR-075KL" RESC1005X40X25LL05T10 907.08,-1168.89 r270 top value=5K
R55 "RC0402FR-077K87L" RESC1005X40X25LL05T10 687,-1278.95 r90 top value=7K87
R56 "RC0402FR-0775RL" RESC1005X40X25LL05T10 297.05,-1285.43 r0 top value=75R
R57 "RC0402FR-0775RL" RESC1005X40X25LL05T10 354.07,-1240.86 r90 top value=75R
R58 "RC0402FR-0737R4L" RESC1005X40X25LL05T10 314.8,-1385.35 r90 top value=37R4
R59 "RC0402FR-07100RL" RESC1005X40X25LL05T10 666.79,-1345.48 r270 top value=100
R60 "RC0402FR-070RL" RESC1005X40X25LL05T10 497.08,-1210.62 r0 top value=0R
R61 "RC0402FR-071KL" RESC1005X40X25LL05T10 547.08,-1492.36 r270 top value=1K
R62 "RC0402FR-071KL" RESC1005X40X25LL05T10 507.08,-1492.36 r270 top value=1K
R63 "RC0402FR-075KL" RESC1005X40X25NL05T10 886.68,-1718.89 r90 top value=5K
R64 "RC0402FR-0775RL" RESC1005X40X25LL05T10 657.59,-1847.83 r90 top value=75R
R65 "RC0402FR-0775RL" RESC1005X40X25LL05T10 657.33,-1913.59 r270 top value=75R
R66 "RC0402FR-0775RL" RESC1005X40X25LL05T10 608.16,-1862.28 r180 top value=75R
R67 "RC0402FR-0775RL" RESC1005X40X25LL05T10 590.26,-1955.35 r270 top value=75R
R68 "RC0402FR-07100KL" RESC1005X40X25LL05T10 2832.68,5.46 r180 bottom value=100K
R69 "RC0402FR-07100KL" RESC1005X40X25NL05T10 2967.68,72.01 r0 top value=100K
R70 "RC0402FR-075KL" RESC1005X40X25NL05T10 977.08,-1718.89 r270 top value=5K
R71 "RC0402FR-075KL" RESC1005X40X25NL05T10 927.08,-1718.89 r270 top value=5K
R72 "RC0402FR-078K06L" RESC1005X40X25LL05T10 717.49,-1809.53 r270 top value=8K06
R73 "RT0402FRE07500RL" RESC1005X40X25NL05T10 809.06,-2125.16 r270 top value=500R
R74 "RC0402FR-07200KL" RESC1005X40X25NL05T10 2765.43,-460.6 r0 top value=200K
R75 "RC0402FR-0763K4L" RESC1005X40X25ML05T10 2837.91,-493.76 r0 top value=63K4
R77 "RC0402FR-07240RL" RESC1005X40X25LL05T10 1196.74,-21.16 r0 top value=240R
R78 "RC0402FR-071K3L" RESC1005X40X25LL05T10 1279.64,-125.84 r90 top value=1K3
R79 "RC0402FR-07240RL" RESC1005X40X25LL05T10 798.04,-125.84 r0 top value=240R
R80 "RC0402FR-071K3L" RESC1005X40X25LL05T10 775.16,0.64 r0 top value=1K3
R81 "RC0402FR-07100RL" RESC1005X40X25LL05T10 692.88,-1404.68 r90 top value=100
R82 "RC0402FR-0710KL" RESC1005X40X25LL05T10 1959.54,-1759.44 r0 bottom value=10K
R83 "RC0402FR-0710KL" RESC1005X40X25LL05T10 1959.54,-1697.03 r0 bottom value=10K
R84 "RC0402FR-0710KL" RESC1005X40X25LL05T10 1959.54,-1885.43 r0 bottom value=10K
R85 "RC0402FR-0710KL" RESC1005X40X25LL05T10 1959.54,-1854.43 r180 bottom value=10K
R86 "RC0402FR-0710KL" RESC1005X40X25LL05T10 1959.54,-1665.43 r0 bottom value=10K
R87 "RC0402FR-0710KL" RESC1005X40X25LL05T10 1959.54,-1728.74 r0 bottom value=10K
R89 "ERJ-3RQFR33V" RESC1608X55X30LL15T15 1731.66,-1925.78 r270 bottom value=0R33
R90 "ERJ-3RQFR33V" RESC1608X55X30LL15T15 1731.46,-1656.57 r270 bottom value=0R33
R97 "RC0402FR-07100RL" RESC1005X40X25LL05T10 1313.23,-785.84 r0 bottom value=100
R98 "RC0402FR-07100RL" RESC1005X40X25LL05T10 1397.98,-749.45 r45 bottom value=100
R99 "RC0402FR-07100RL" RESC1005X40X25LL05T10 1197.07,-770.37 r225 bottom value=100
R100 "RC0402FR-07100RL" RESC1005X40X25LL05T10 1332.76,-747.58 r270 bottom value=100
R101 "RC0402FR-07100RL" RESC1005X40X25LL05T10 1369.06,-711.26 r225 bottom value=100
R102 "RC0402FR-07100RL" RESC1005X40X25LL05T10 1252.58,-866.35 r0 bottom value=100
R103 "RC0402FR-07100RL" RESC1005X40X25LL05T10 1870.38,-1981.92 r0 bottom value=100
RN1 "" TC124FR0739RL 668.42,-484.04 r0 bottom
RN2 "" TC124FR0739RL 473.07,-908.03 r90 bottom
RN3 "" TC124FR0739RL 909.55,-774.9 r0 bottom
RN4 "" TC124FR0739RL 473.16,-709.73 r90 bottom
RN5 "" TC124FR0739RL 997.27,-775.45 r0 bottom
RN6 "" TC124FR0739RL 472.95,-823.49 r90 bottom
SB1 "Solderbridge" Solderbridge 969.05,-1128.31 r270 top
SB2 "Solderbridge" Solderbridge 863.5,-1128.31 r270 top
SB3 "Solderbridge" Solderbridge 837.08,-1720.62 r270 top
SB4 "Solderbridge" Solderbridge 2022.16,-1853.45 r0 bottom
SB5 "Solderbridge" Solderbridge 2020.54,-1664.87 r0 bottom
SB6 "Solderbridge" Solderbridge 2021.4,-1729.2 r0 bottom
T1 "7498011122AR" 7498011122AR 2898.82,-997.67 r90 top locked
TP1 "Ø1.0mm,SMD" TP_SMD_Ø1.0mm 2571.78,-373.57 r0 top
TP2 "Ø1.0mm,SMD" TP_SMD_Ø1.0mm 1660.46,-221.77 r90 top
TP3 "Ø1.0mm,SMD" TP_SMD_Ø1.0mm 2154.97,-273.16 r90 top
TP4 "Ø1.0mm,SMD" TP_SMD_Ø1.0mm 2505.49,-155.39 r90 top
TP5 "Ø1.0mm,SMD" TP_SMD_Ø1.0mm 2609.87,-620.54 r90 top
U1 "FXLA108BQX" FP-510CD-MFG 1358.75,-1292.09 r270 top
U2 "LMH0344SQ" SQB16A 497.75,-1340.87 r0 top
U3 "LMH0340SQ/NOPB" RHS0048A_V 877.6,-1921.02 r270 top
U4 "LMH0341SQX/NOPB" RHS0048A_V 876.68,-1384.44 r270 top
U5 "LM3881MME/NOPB" FP-DGK0008A-MFG 2835.55,-13.89 r180 top
U6 "S25FL256SAGBHI200" BGA24C100P4X6_600X800X120 2091.5,-739.83 r0 top
U7 "XC7A35T-2CSG324C-1111" BGA324C80P18X18_1500X1500X150 1546.59,-694.76 r0 top
U8 "MT41K512M8DA-107_IT_P" BGA78C80P9X13_800X1050X120 704.13,-729.92 r0 top locked
U9 "TPS51206DSQR" SON40P200X200X80-11N 503.48,-380.25 r180 top
U10 "" QFN50P500X500X100-33N-D 2122.91,-1276.61 r180 top
U11 "MP5077GG-Z" MP5077GGZ 2801.96,-309.64 r180 top
U12 "MPM3860GQW-Z" MPM3650CGQWZ 2193.67,-47.98 r270 top
U13 "MPM3834CGPA-P" MPM3834CGPAP 1762.33,-83.02 r270 top
U14 "MPM3834CGPA-P" MPM3834CGPAP 2603.36,-19.18 r270 top
U15 "MPM3834CGPA-P" MPM3834CGPAP 2800.95,-582.9 r180 top
U16 "TCA39306DTMR" TCA39306DTMR 1357.11,-1461.25 r180 top
Y1 "SIT8008BI-73-XXS-100.000000" FP-SiT8008-7-MFG 1158.46,-531.63 r0 bottom
Y2 "SiT8008BI-73-XXS-25.000000" QFN_2016_4pins 1868.58,-1350.31 r0 top
Y3 "XLL536148.500000I" JS6_MFG 1804.11,-1155.22 r90 bottom

## Footprints (in the part's own frame and the unit in brackets; to place one, negate y for a bottom-side part, rotate by r counter-clockwise, add the part's x,y. Pads: shape width x height; smd on the part's side, far side on the other; paste and mask are expansions set on the pad)
1888247-1 [mm]
  rect 2x0.5 smd: 1(4.1,-3.4) 2(4.1,-2.6) 3(4.1,-1.8) 4(4.1,-1) 5(4.1,-0.2) 6(4.1,0.6) 7(4.1,1.4) 8(4.1,2.2) 9(4.1,3) 10(4.1,3.8) 11(-4.1,3.4) 12(-4.1,2.6) 13(-4.1,1.8) 14(-4.1,1) 15(-4.1,0.2) 16(-4.1,-0.6) 17(-4.1,-1.4) 18(-4.1,-2.2) 19(-4.1,-3) 20(-4.1,-3.8)
  round 0.775 hole 1.55 unplated: 21(0,-4.8) 22(0,4.8)
  silkscreen extent -4.3,-5.5 5.7,5.5, body extent -4.47,-5.5 4.53,5.5, height 5.19
2007215-1 [mm]
  rect 2x2 hole 1.05: MH1(-30.9,7.112) MH2(-30.9,-1.468) MH3(-25.9,-7.138) MH4(-15.9,-7.138) MH6(-5.9,-7.138) MH9(4.1,-7.138) MH17(-10.9,7.112) MH18(-20.9,7.112) MH19(-10.9,1.432) MH20(-10.9,-3.968)
  round 1.478 hole 0.95: MH5(-8.4,-7.138) MH7(-3.4,-7.138) MH8(1.3,-7.138) MH10(6.3,-4.818) MH11(6.3,-0.018) MH12(6.3,4.782) MH13(1.6,7.112) MH15(-3.4,7.112) MH16(-8.1,7.112)
  rect 2x2 hole 0.85: MH14(-0.9,7.112)
  silkscreen extent -42.4,-7.01 7.25,6.99, body extent -42.5,-8.17 6.3,8.13, height 10.71
7498011122AR [mm]
  rect 0.71x3 smd: 1(3.57,10.79) 2(2.55,10.79) 3(1.53,10.79) 4(0.51,10.79) 5(-0.51,10.79) 6(-1.53,10.79) 8(-3.57,10.79) 9(-5.61,10.79) 10(-6.63,10.79) 11(6.63,10.79) 12(5.61,10.79)
  round 0.7 hole 1.4 unplated: MH1(3.5,7.29) MH2(-3.5,7.29)
  rect 1.4x3 smd: MP1(8.725,-2.91) MP2(-8.725,-2.91)
  silkscreen extent -7.83,-10.92 7.83,12.8, body extent -9.08,-10.92 9.08,11.15, height 10.15
BGA24C100P4X6_600X800X120 [mm]
  round 0.37 smd: A1(-1.5,2.5) A2(-0.5,2.5) A3(0.5,2.5) A4(1.5,2.5) B1(-1.5,1.5) B2(-0.5,1.5) B3(0.5,1.5) B4(1.5,1.5) C1(-1.5,0.5) C2(-0.5,0.5) C3(0.5,0.5) C4(1.5,0.5) D1(-1.5,-0.5) D2(-0.5,-0.5) D3(0.5,-0.5) D4(1.5,-0.5) E1(-1.5,-1.5) E2(-0.5,-1.5) E3(0.5,-1.5) E4(1.5,-1.5) F1(-1.5,-2.5) F2(-0.5,-2.5) F3(0.5,-2.5) F4(1.5,-2.5)
  silkscreen extent -3.1,-4 3,4.1, body extent -3,-4 3,4, height 1.2
BGA78C80P9X13_800X1050X120 [mm]
  round 0.41 smd: A1(-3.2,4.8) A2(-2.4,4.8) A3(-1.6,4.8) A7(1.6,4.8) A8(2.4,4.8) A9(3.2,4.8) B1(-3.2,4) B2(-2.4,4) B3(-1.6,4) B7(1.6,4) B8(2.4,4) B9(3.2,4) C1(-3.2,3.2) C2(-2.4,3.2) C3(-1.6,3.2) C7(1.6,3.2) C8(2.4,3.2) C9(3.2,3.2) D1(-3.2,2.4) D2(-2.4,2.4) D3(-1.6,2.4) D7(1.6,2.4) D8(2.4,2.4) D9(3.2,2.4) E1(-3.2,1.6) E2(-2.4,1.6) E3(-1.6,1.6) E7(1.6,1.6) E8(2.4,1.6) E9(3.2,1.6) F1(-3.2,0.8) F2(-2.4,0.8) F3(-1.6,0.8) F7(1.6,0.8) F8(2.4,0.8) F9(3.2,0.8) G1(-3.2,0) G2(-2.4,0) G3(-1.6,0) G7(1.6,0) G8(2.4,0) G9(3.2,0) H1(-3.2,-0.8) H2(-2.4,-0.8) H3(-1.6,-0.8) H7(1.6,-0.8) H8(2.4,-0.8) H9(3.2,-0.8) J1(-3.2,-1.6) J2(-2.4,-1.6) J3(-1.6,-1.6) J7(1.6,-1.6) J8(2.4,-1.6) J9(3.2,-1.6) K1(-3.2,-2.4) K2(-2.4,-2.4) K3(-1.6,-2.4) K7(1.6,-2.4) K8(2.4,-2.4) K9(3.2,-2.4) L1(-3.2,-3.2) L2(-2.4,-3.2) L3(-1.6,-3.2) L7(1.6,-3.2) L8(2.4,-3.2) L9(3.2,-3.2) M1(-3.2,-4) M2(-2.4,-4) M3(-1.6,-4) M7(1.6,-4) M8(2.4,-4) M9(3.2,-4) N1(-3.2,-4.8) N2(-2.4,-4.8) N3(-1.6,-4.8) N7(1.6,-4.8) N8(2.4,-4.8) N9(3.2,-4.8)
  silkscreen extent -4.1,-5.33 4,5.45, body extent -4,-5.25 4,5.25, height 1.2
BGA324C80P18X18_1500X1500X150 [mm]
  round 0.41 smd: A1(-6.8,6.8) A2(-6,6.8) A3(-5.2,6.8) A4(-4.4,6.8) A5(-3.6,6.8) A6(-2.8,6.8) A7(-2,6.8) A8(-1.2,6.8) A9(-0.4,6.8) A10(0.4,6.8) A11(1.2,6.8) A12(2,6.8) A13(2.8,6.8) A14(3.6,6.8) A15(4.4,6.8) A16(5.2,6.8) A17(6,6.8) A18(6.8,6.8) B1(-6.8,6) B2(-6,6) B3(-5.2,6) B4(-4.4,6) B5(-3.6,6) B6(-2.8,6) B7(-2,6) B8(-1.2,6) B9(-0.4,6) B10(0.4,6) B11(1.2,6) B12(2,6) B13(2.8,6) B14(3.6,6) B15(4.4,6) B16(5.2,6) B17(6,6) B18(6.8,6) C1(-6.8,5.2) C2(-6,5.2) C3(-5.2,5.2) C4(-4.4,5.2) C5(-3.6,5.2) C6(-2.8,5.2) C7(-2,5.2) C8(-1.2,5.2) C9(-0.4,5.2) C10(0.4,5.2) C11(1.2,5.2) C12(2,5.2) C13(2.8,5.2) C14(3.6,5.2) C15(4.4,5.2) C16(5.2,5.2) C17(6,5.2) C18(6.8,5.2) D1(-6.8,4.4) D2(-6,4.4) D3(-5.2,4.4) D4(-4.4,4.4) D5(-3.6,4.4) D6(-2.8,4.4) D7(-2,4.4) D8(-1.2,4.4) D9(-0.4,4.4) D10(0.4,4.4) D11(1.2,4.4) D12(2,4.4) D13(2.8,4.4) D14(3.6,4.4) D15(4.4,4.4) D16(5.2,4.4) D17(6,4.4) D18(6.8,4.4) E1(-6.8,3.6) E2(-6,3.6) E3(-5.2,3.6) E4(-4.4,3.6) E5(-3.6,3.6) E6(-2.8,3.6) E7(-2,3.6) E8(-1.2,3.6) E9(-0.4,3.6) E10(0.4,3.6) E11(1.2,3.6) E12(2,3.6) E13(2.8,3.6) E14(3.6,3.6) E15(4.4,3.6) E16(5.2,3.6) E17(6,3.6) E18(6.8,3.6) F1(-6.8,2.8) F2(-6,2.8) F3(-5.2,2.8) F4(-4.4,2.8) F5(-3.6,2.8) F6(-2.8,2.8) F7(-2,2.8) F8(-1.2,2.8) F9(-0.4,2.8) F10(0.4,2.8) F11(1.2,2.8) F12(2,2.8) F13(2.8,2.8) F14(3.6,2.8) F15(4.4,2.8) F16(5.2,2.8) F17(6,2.8) F18(6.8,2.8) G1(-6.8,2) G2(-6,2) G3(-5.2,2) G4(-4.4,2) G5(-3.6,2) G6(-2.8,2) G7(-2,2) G8(-1.2,2) G9(-0.4,2) G10(0.4,2) G11(1.2,2) G12(2,2) G13(2.8,2) G14(3.6,2) G15(4.4,2) G16(5.2,2) G17(6,2) G18(6.8,2) H1(-6.8,1.2) H2(-6,1.2) H3(-5.2,1.2) H4(-4.4,1.2) H5(-3.6,1.2) H6(-2.8,1.2) H7(-2,1.2) H8(-1.2,1.2) H9(-0.4,1.2) H10(0.4,1.2) H11(1.2,1.2) H12(2,1.2) H13(2.8,1.2) H14(3.6,1.2) H15(4.4,1.2) H16(5.2,1.2) H17(6,1.2) H18(6.8,1.2) J1(-6.8,0.4) J2(-6,0.4) J3(-5.2,0.4) J4(-4.4,0.4) J5(-3.6,0.4) J6(-2.8,0.4) J7(-2,0.4) J8(-1.2,0.4) J9(-0.4,0.4) J10(0.4,0.4) J11(1.2,0.4) J12(2,0.4) J13(2.8,0.4) J14(3.6,0.4) J15(4.4,0.4) J16(5.2,0.4) J17(6,0.4) J18(6.8,0.4) K1(-6.8,-0.4) K2(-6,-0.4) K3(-5.2,-0.4) K4(-4.4,-0.4) K5(-3.6,-0.4) K6(-2.8,-0.4) K7(-2,-0.4) K8(-1.2,-0.4) K9(-0.4,-0.4) K10(0.4,-0.4) K11(1.2,-0.4) K12(2,-0.4) K13(2.8,-0.4) K14(3.6,-0.4) K15(4.4,-0.4) K16(5.2,-0.4) K17(6,-0.4) K18(6.8,-0.4) L1(-6.8,-1.2) L2(-6,-1.2) L3(-5.2,-1.2) L4(-4.4,-1.2) L5(-3.6,-1.2) L6(-2.8,-1.2) L7(-2,-1.2) L8(-1.2,-1.2) L9(-0.4,-1.2) L10(0.4,-1.2) L11(1.2,-1.2) L12(2,-1.2) L13(2.8,-1.2) L14(3.6,-1.2) L15(4.4,-1.2) L16(5.2,-1.2) L17(6,-1.2) L18(6.8,-1.2) M1(-6.8,-2) M2(-6,-2) M3(-5.2,-2) M4(-4.4,-2) M5(-3.6,-2) M6(-2.8,-2) M7(-2,-2) M8(-1.2,-2) M9(-0.4,-2) M10(0.4,-2) M11(1.2,-2) M12(2,-2) M13(2.8,-2) M14(3.6,-2) M15(4.4,-2) M16(5.2,-2) M17(6,-2) M18(6.8,-2) N1(-6.8,-2.8) N2(-6,-2.8) N3(-5.2,-2.8) N4(-4.4,-2.8) N5(-3.6,-2.8) N6(-2.8,-2.8) N7(-2,-2.8) N8(-1.2,-2.8) N9(-0.4,-2.8) N10(0.4,-2.8) N11(1.2,-2.8) N12(2,-2.8) N13(2.8,-2.8) N14(3.6,-2.8) N15(4.4,-2.8) N16(5.2,-2.8) N17(6,-2.8) N18(6.8,-2.8) P1(-6.8,-3.6) P2(-6,-3.6) P3(-5.2,-3.6) P4(-4.4,-3.6) P5(-3.6,-3.6) P6(-2.8,-3.6) P7(-2,-3.6) P8(-1.2,-3.6) P9(-0.4,-3.6) P10(0.4,-3.6) P11(1.2,-3.6) P12(2,-3.6) P13(2.8,-3.6) P14(3.6,-3.6) P15(4.4,-3.6) P16(5.2,-3.6) P17(6,-3.6) P18(6.8,-3.6) R1(-6.8,-4.4) R2(-6,-4.4) R3(-5.2,-4.4) R4(-4.4,-4.4) R5(-3.6,-4.4) R6(-2.8,-4.4) R7(-2,-4.4) R8(-1.2,-4.4) R9(-0.4,-4.4) R10(0.4,-4.4) R11(1.2,-4.4) R12(2,-4.4) R13(2.8,-4.4) R14(3.6,-4.4) R15(4.4,-4.4) R16(5.2,-4.4) R17(6,-4.4) R18(6.8,-4.4) T1(-6.8,-5.2) T2(-6,-5.2) T3(-5.2,-5.2) T4(-4.4,-5.2) T5(-3.6,-5.2) T6(-2.8,-5.2) T7(-2,-5.2) T8(-1.2,-5.2) T9(-0.4,-5.2) T10(0.4,-5.2) T11(1.2,-5.2) T12(2,-5.2) T13(2.8,-5.2) T14(3.6,-5.2) T15(4.4,-5.2) T16(5.2,-5.2) T17(6,-5.2) T18(6.8,-5.2) U1(-6.8,-6) U2(-6,-6) U3(-5.2,-6) U4(-4.4,-6) U5(-3.6,-6) U6(-2.8,-6) U7(-2,-6) U8(-1.2,-6) U9(-0.4,-6) U10(0.4,-6) U11(1.2,-6) U12(2,-6) U13(2.8,-6) U14(3.6,-6) U15(4.4,-6) U16(5.2,-6) U17(6,-6) U18(6.8,-6) V1(-6.8,-6.8) V2(-6,-6.8) V3(-5.2,-6.8) V4(-4.4,-6.8) V5(-3.6,-6.8) V6(-2.8,-6.8) V7(-2,-6.8) V8(-1.2,-6.8) V9(-0.4,-6.8) V10(0.4,-6.8) V11(1.2,-6.8) V12(2,-6.8) V13(2.8,-6.8) V14(3.6,-6.8) V15(4.4,-6.8) V16(5.2,-6.8) V17(6,-6.8) V18(6.8,-6.8)
  silkscreen extent -7.6,-7.5 7.5,7.6, body extent -7.5,-7.5 7.5,7.5, height 1.5
CAPC1005X55N [mm]
  rect 0.6x0.62 smd: 1(-0.46,0) 2(0.46,0)
  body extent -0.5,-0.25 0.5,0.25, height 0.55
CAPC1005X55X10LL05 [mm] "Chip Capacitor, 2-Leads, Body 1.05x0.55mm, IPC High Density"
  rect 0.32x0.52 smd: 1(-0.5,0) 2(0.5,0)
  silkscreen extent -0.83,-0.46 0.83,0.46, body extent -0.53,-0.28 0.53,0.28, height 0.55